# EAGLE board yacc2buss (EAGLE 9.6.2), part 1 of 4
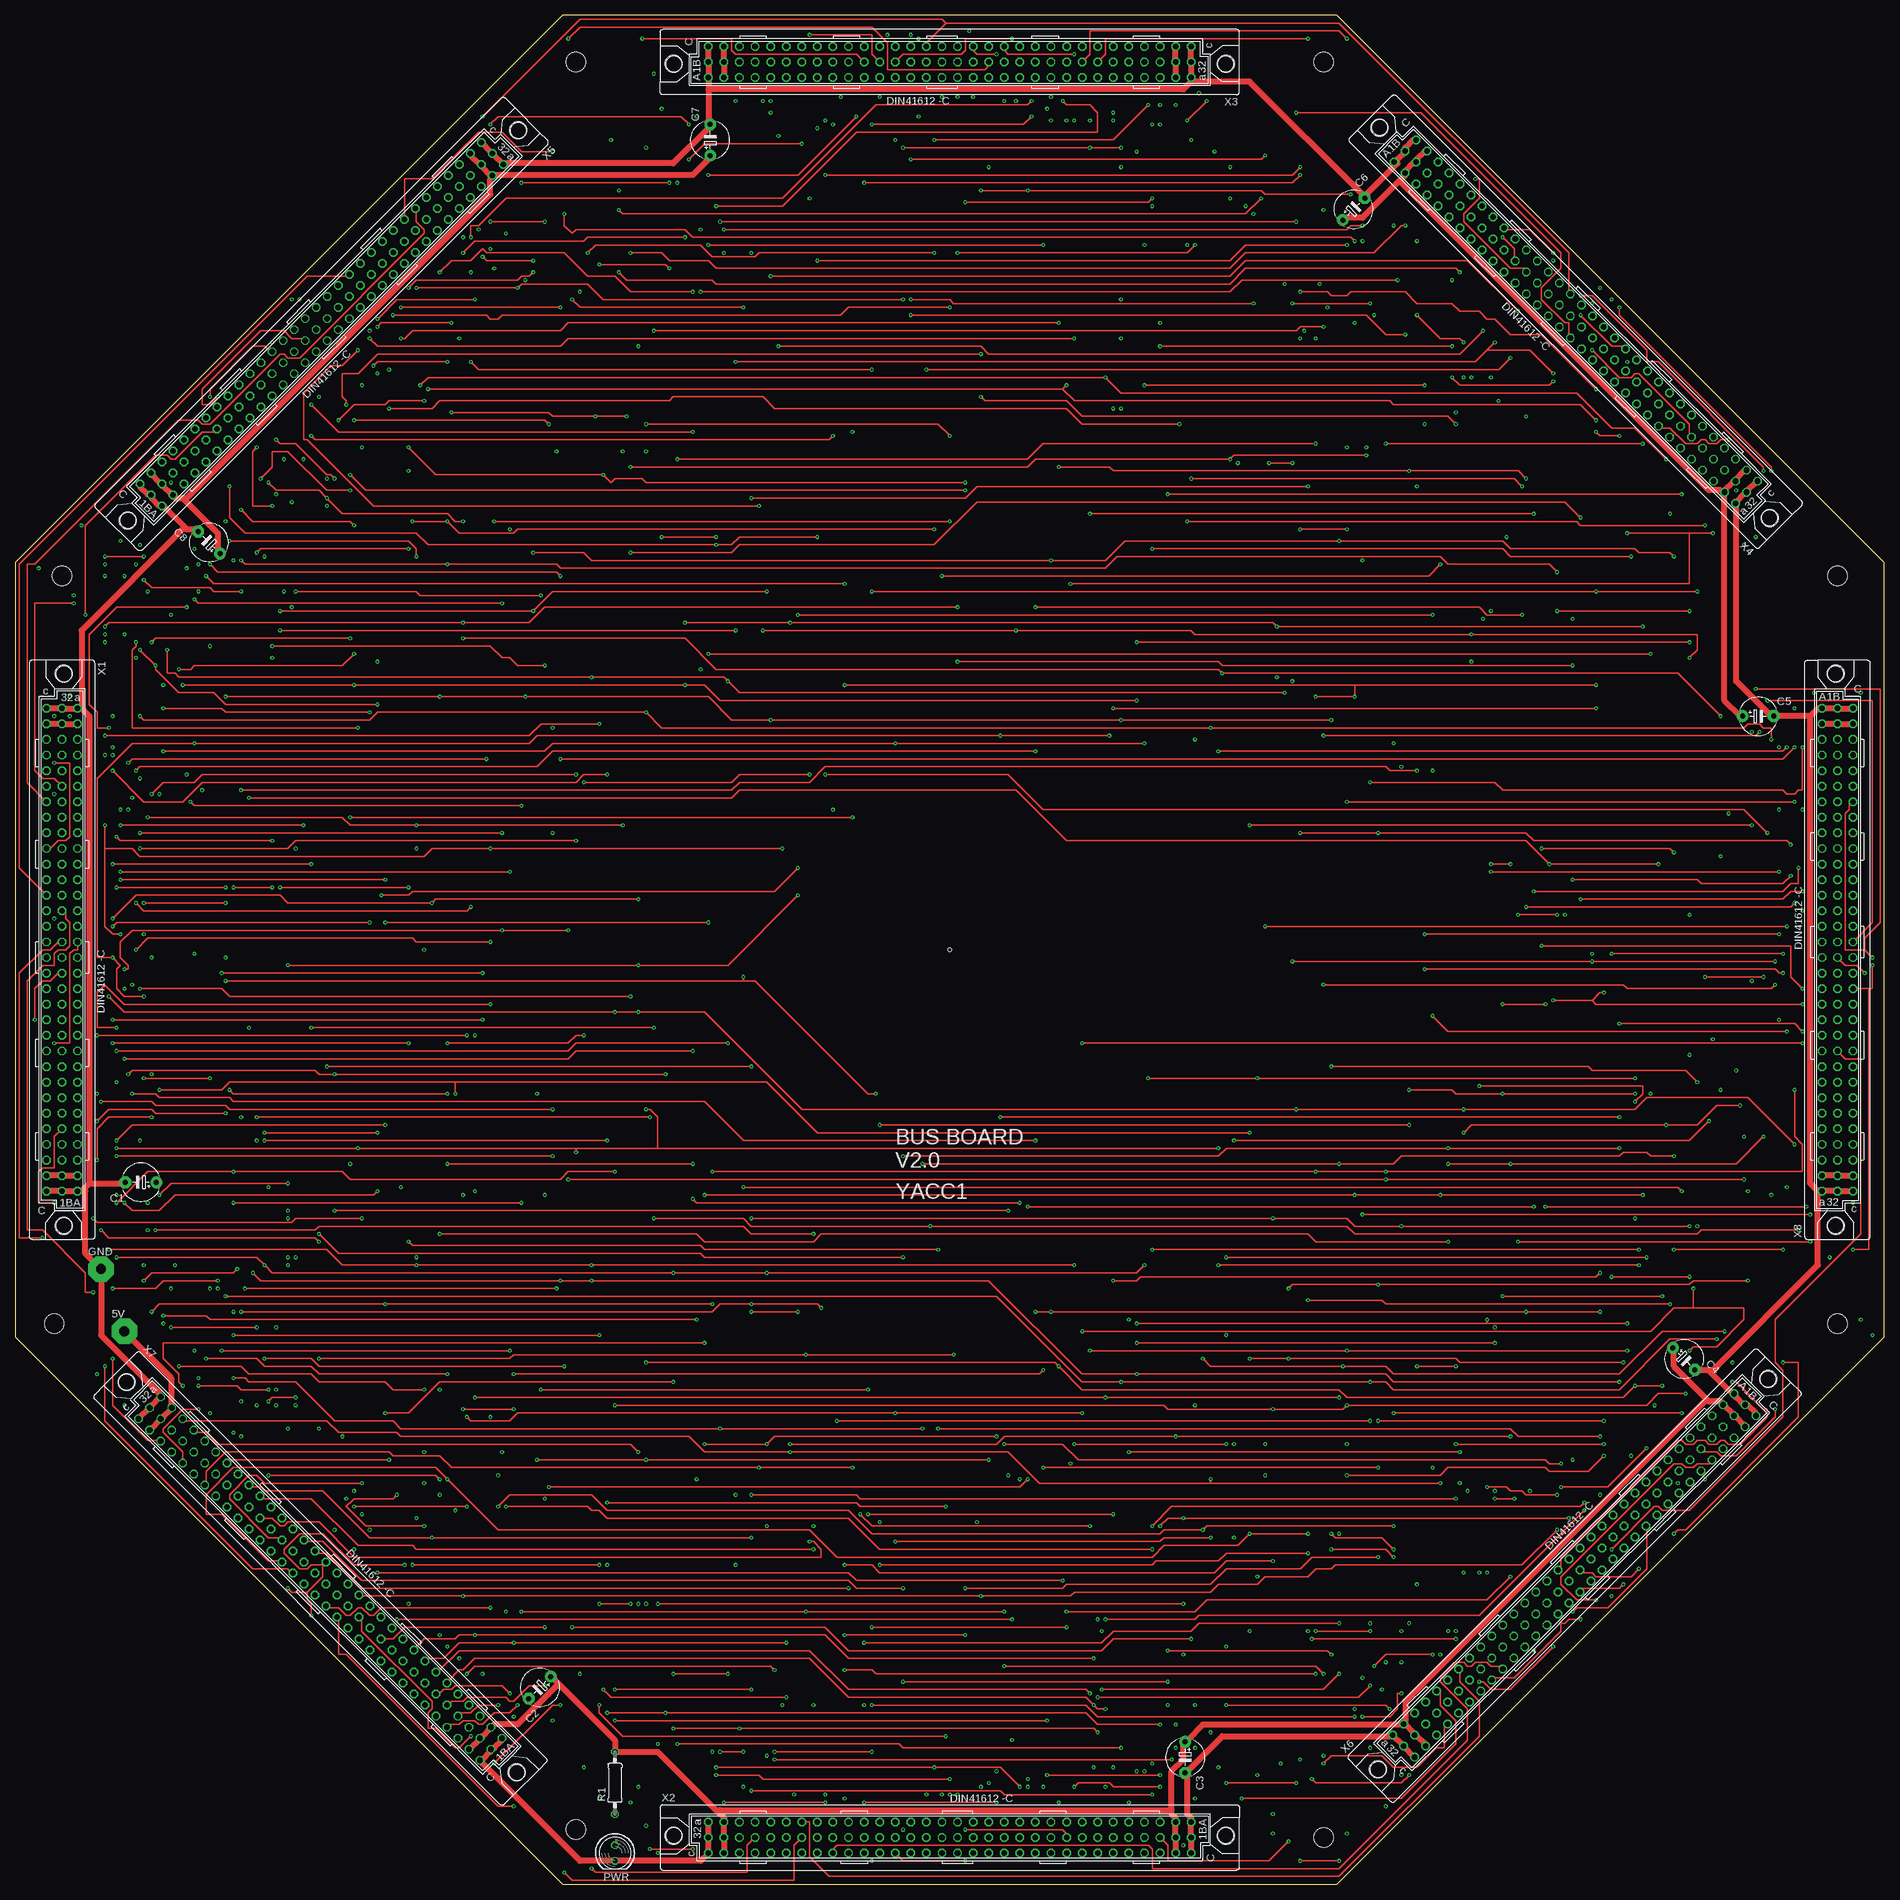
[diagram p0: board, top side]
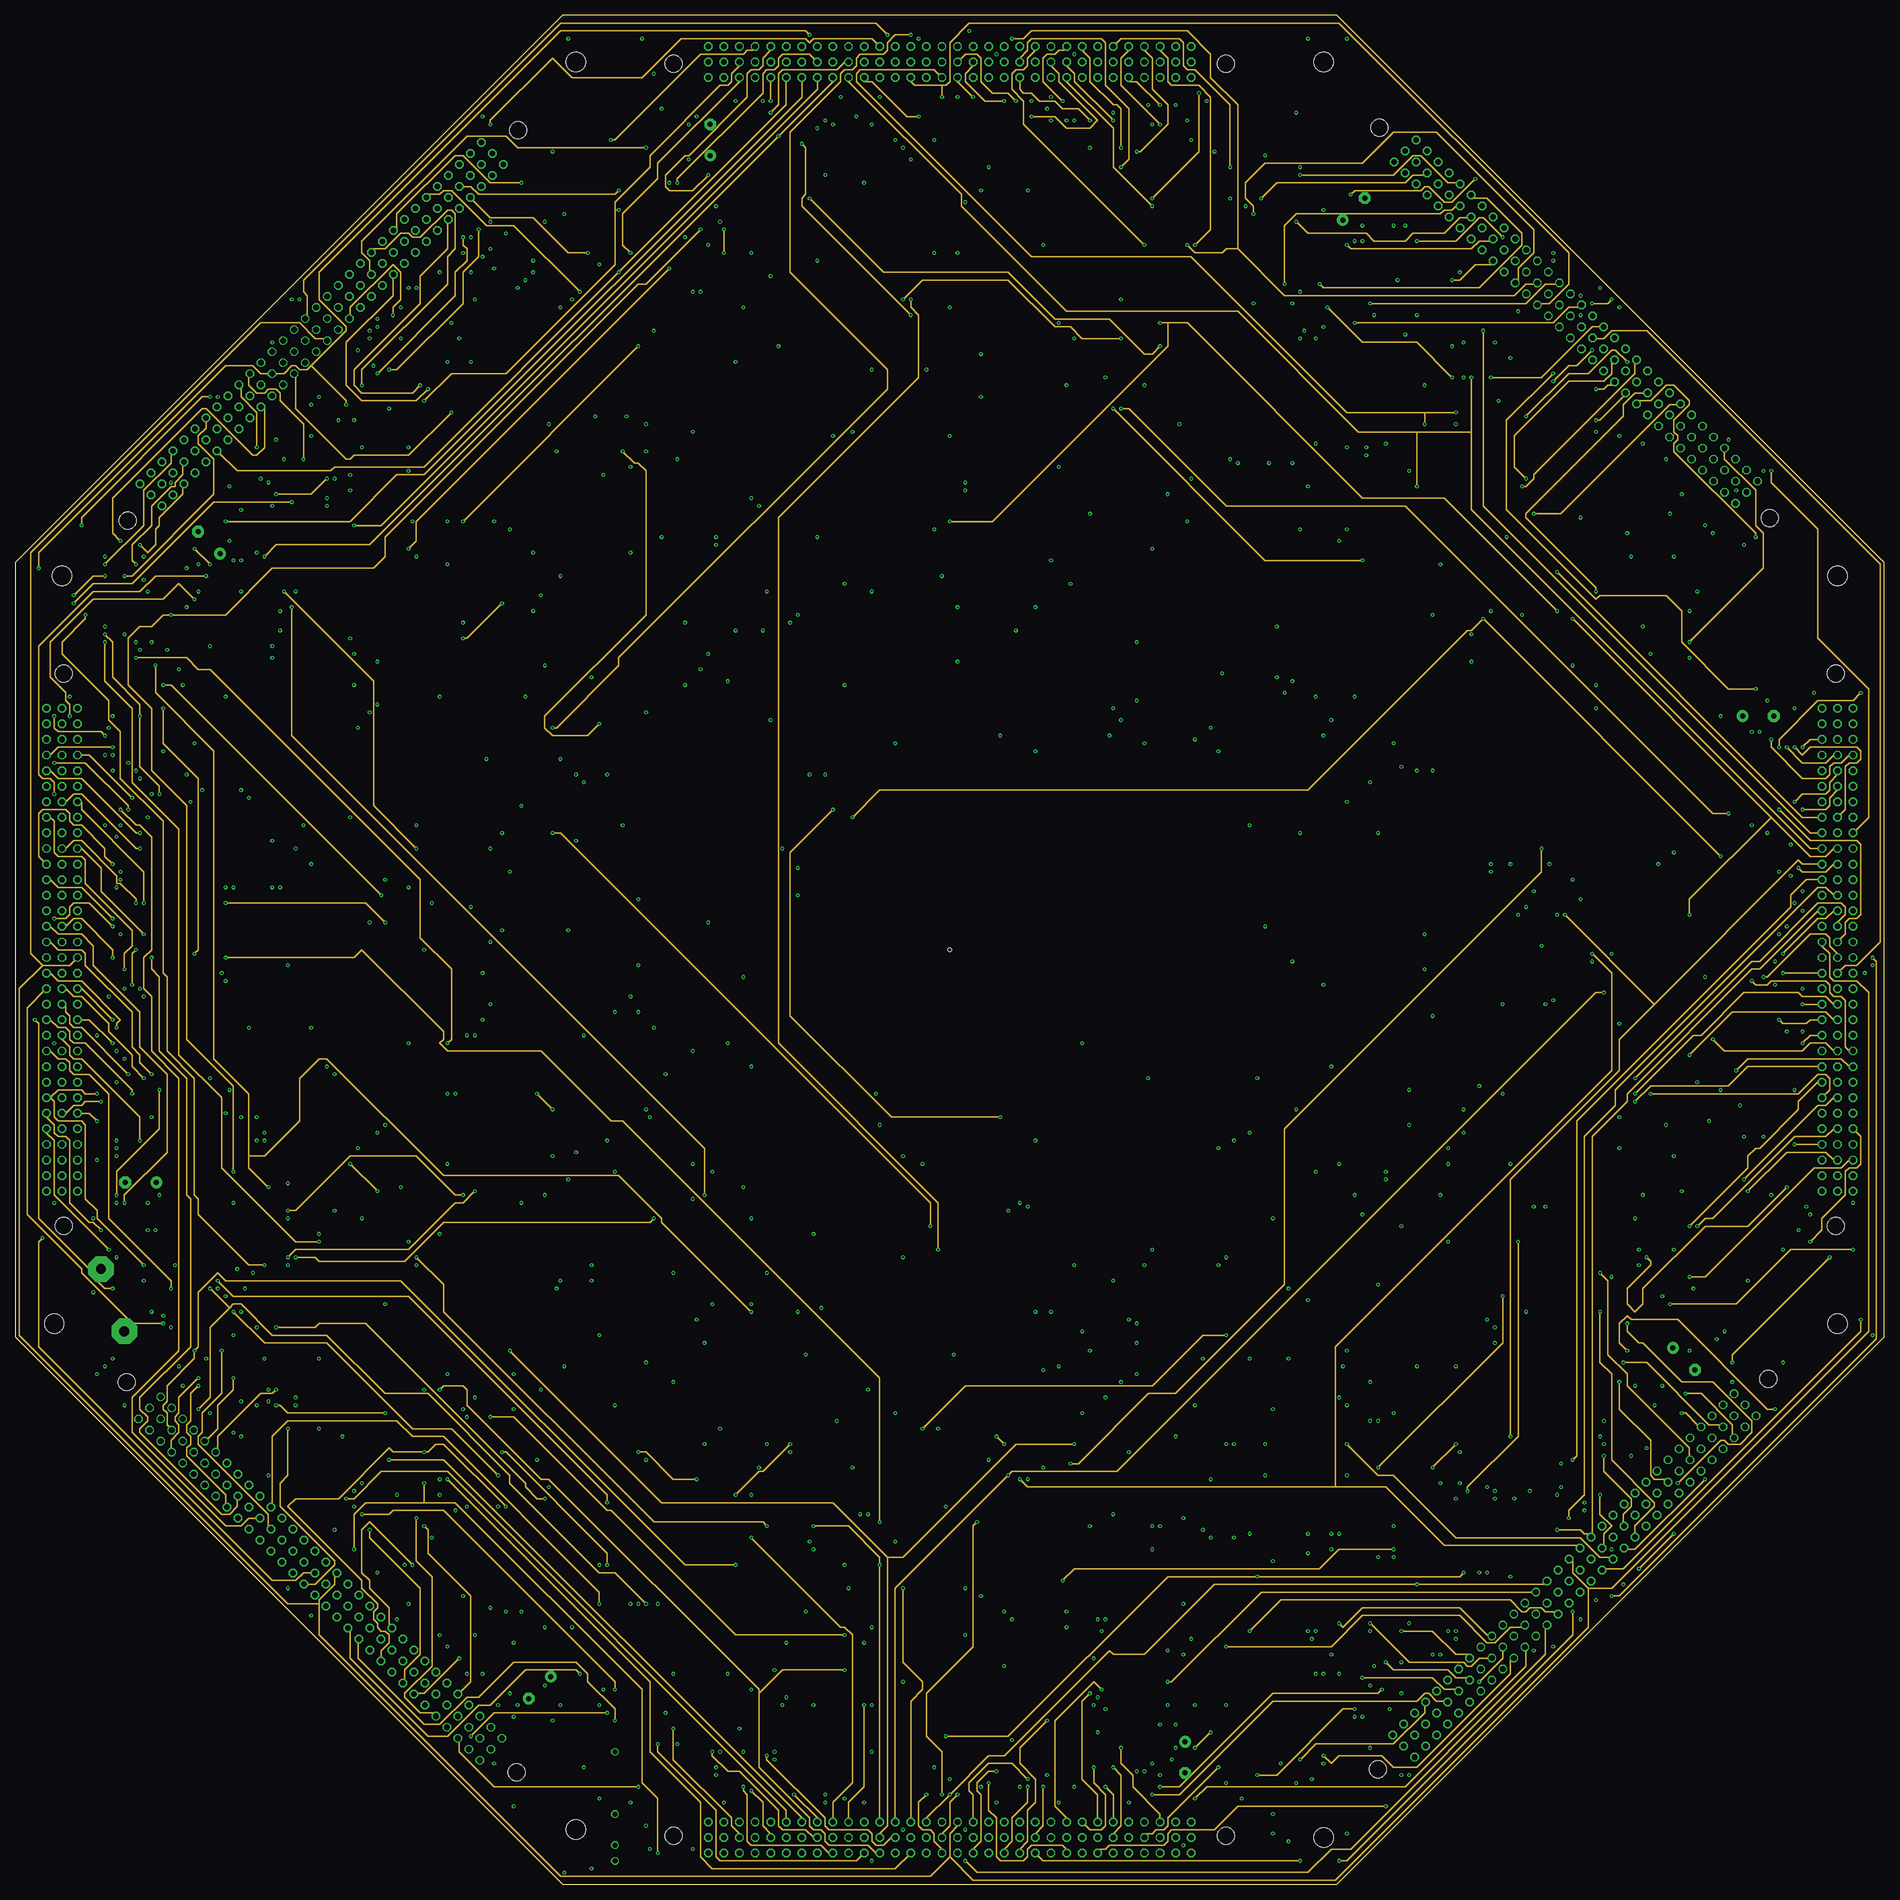
[diagram p1: board, inner layer Route2]
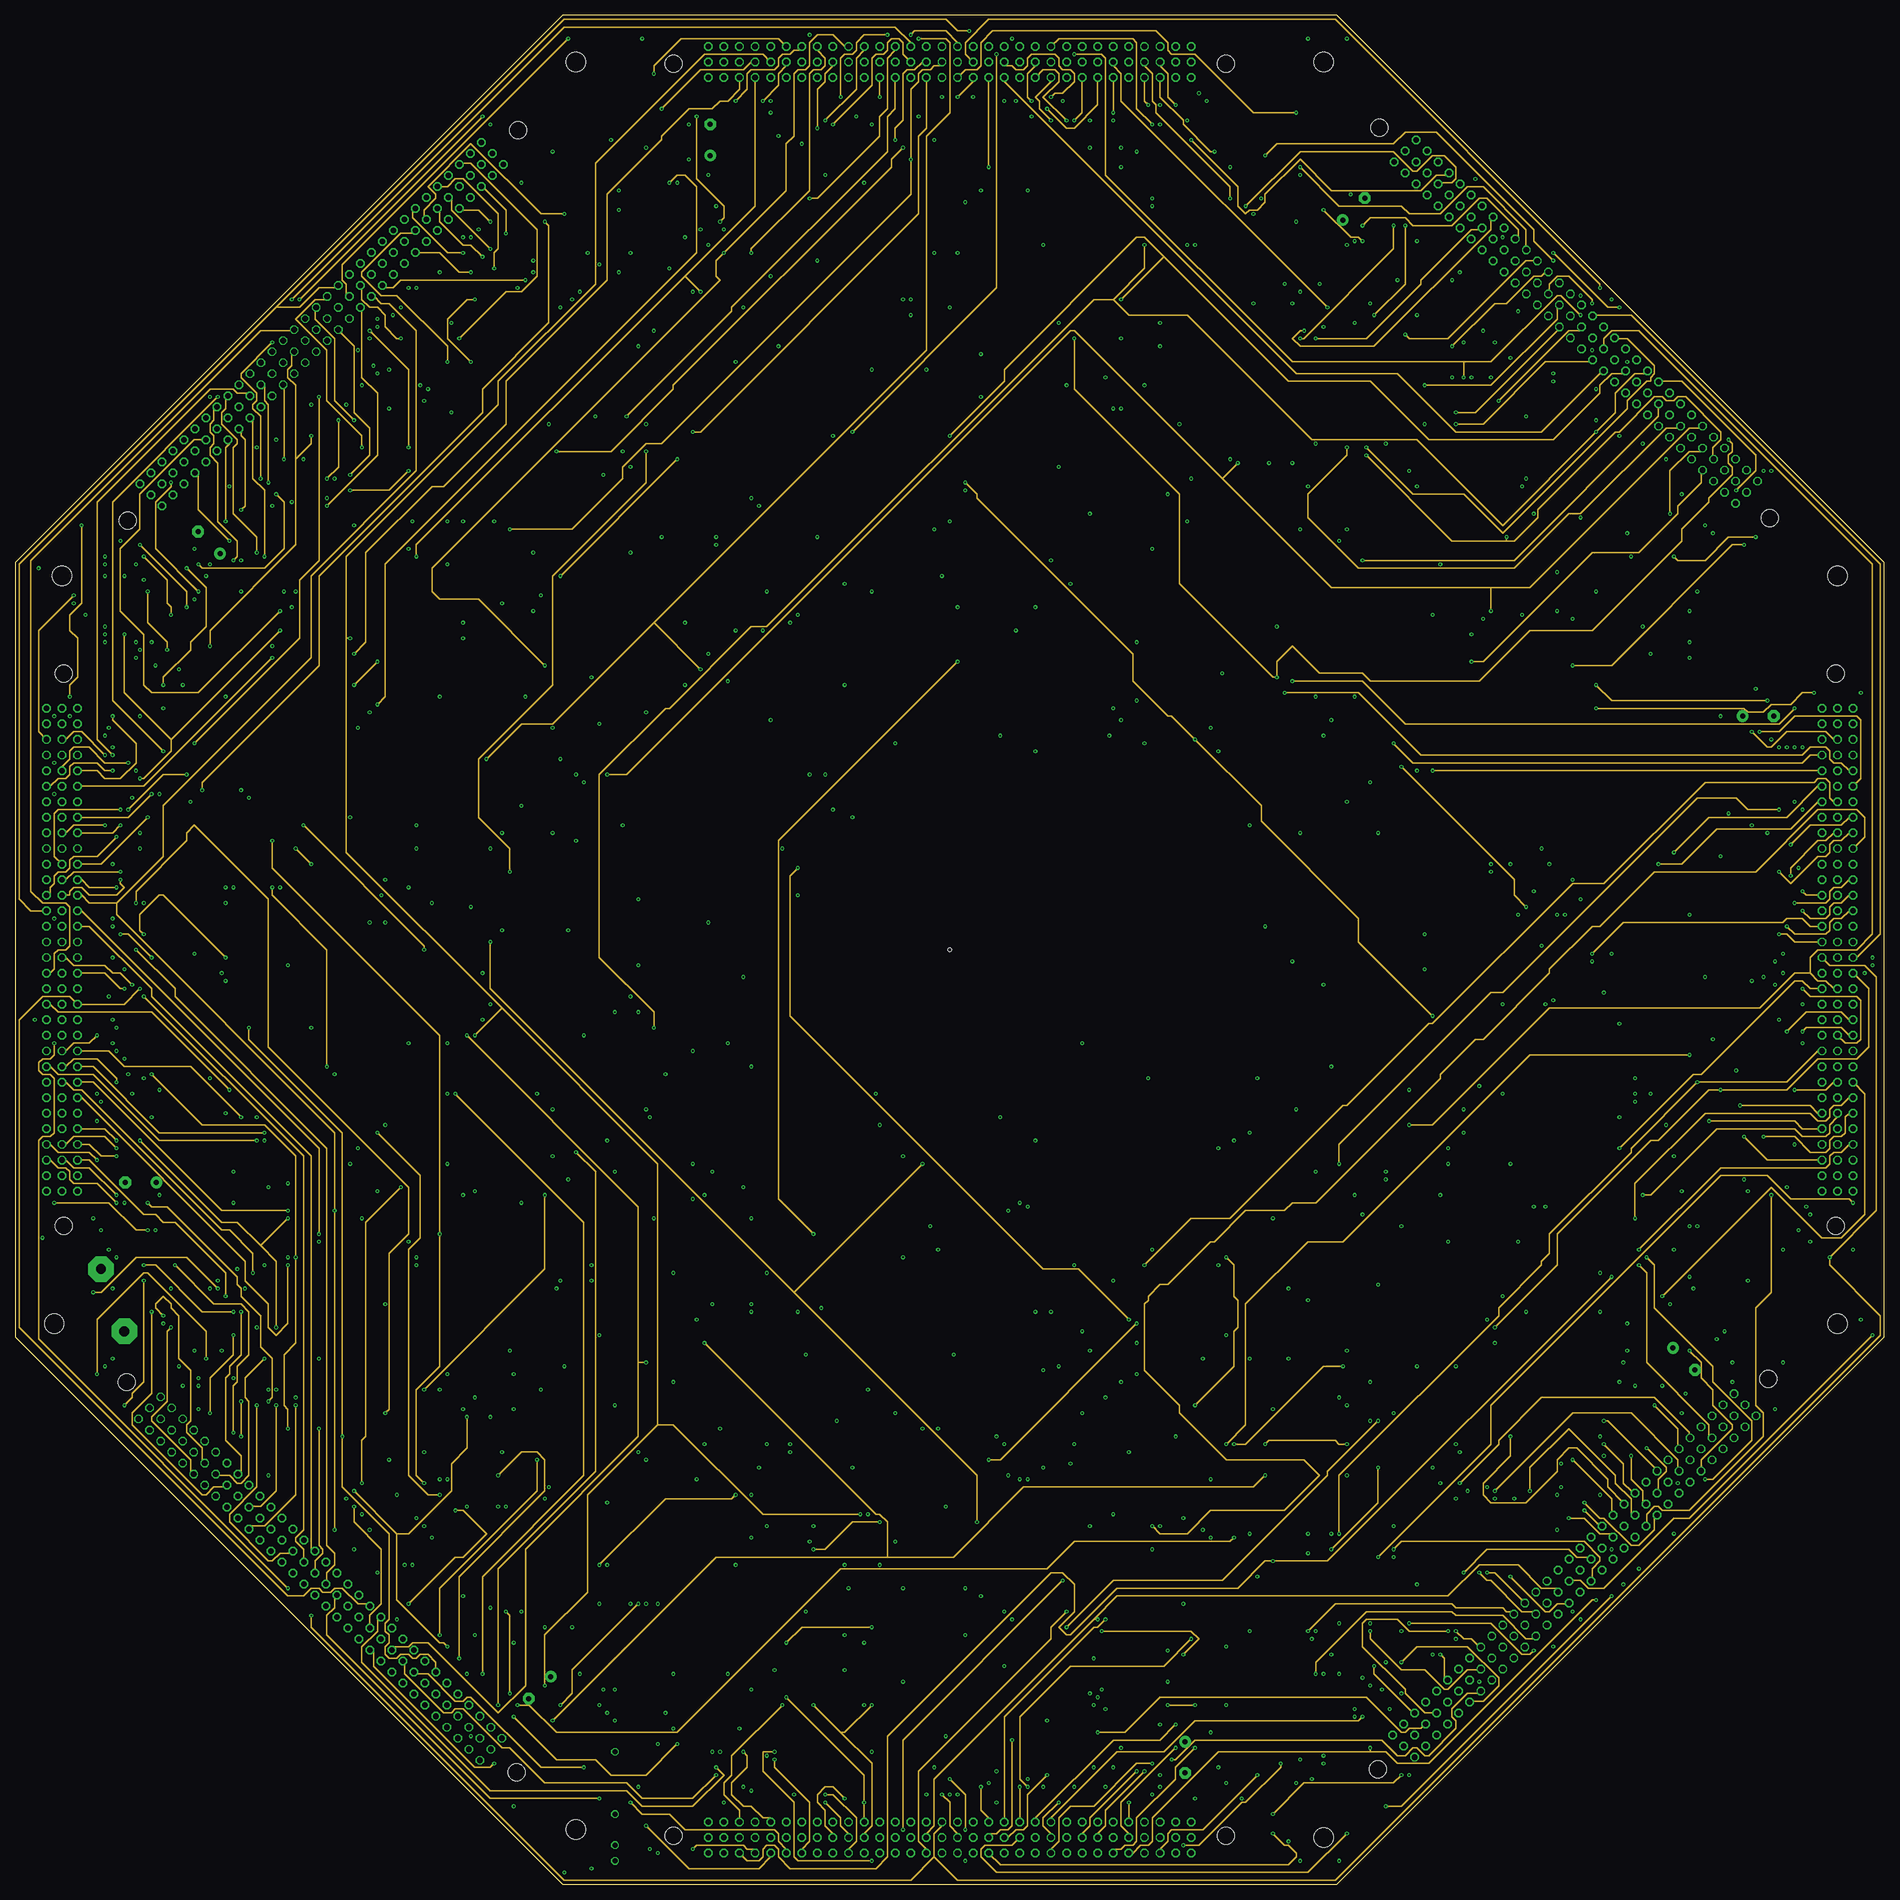
[diagram p2: board, inner layer Route15]
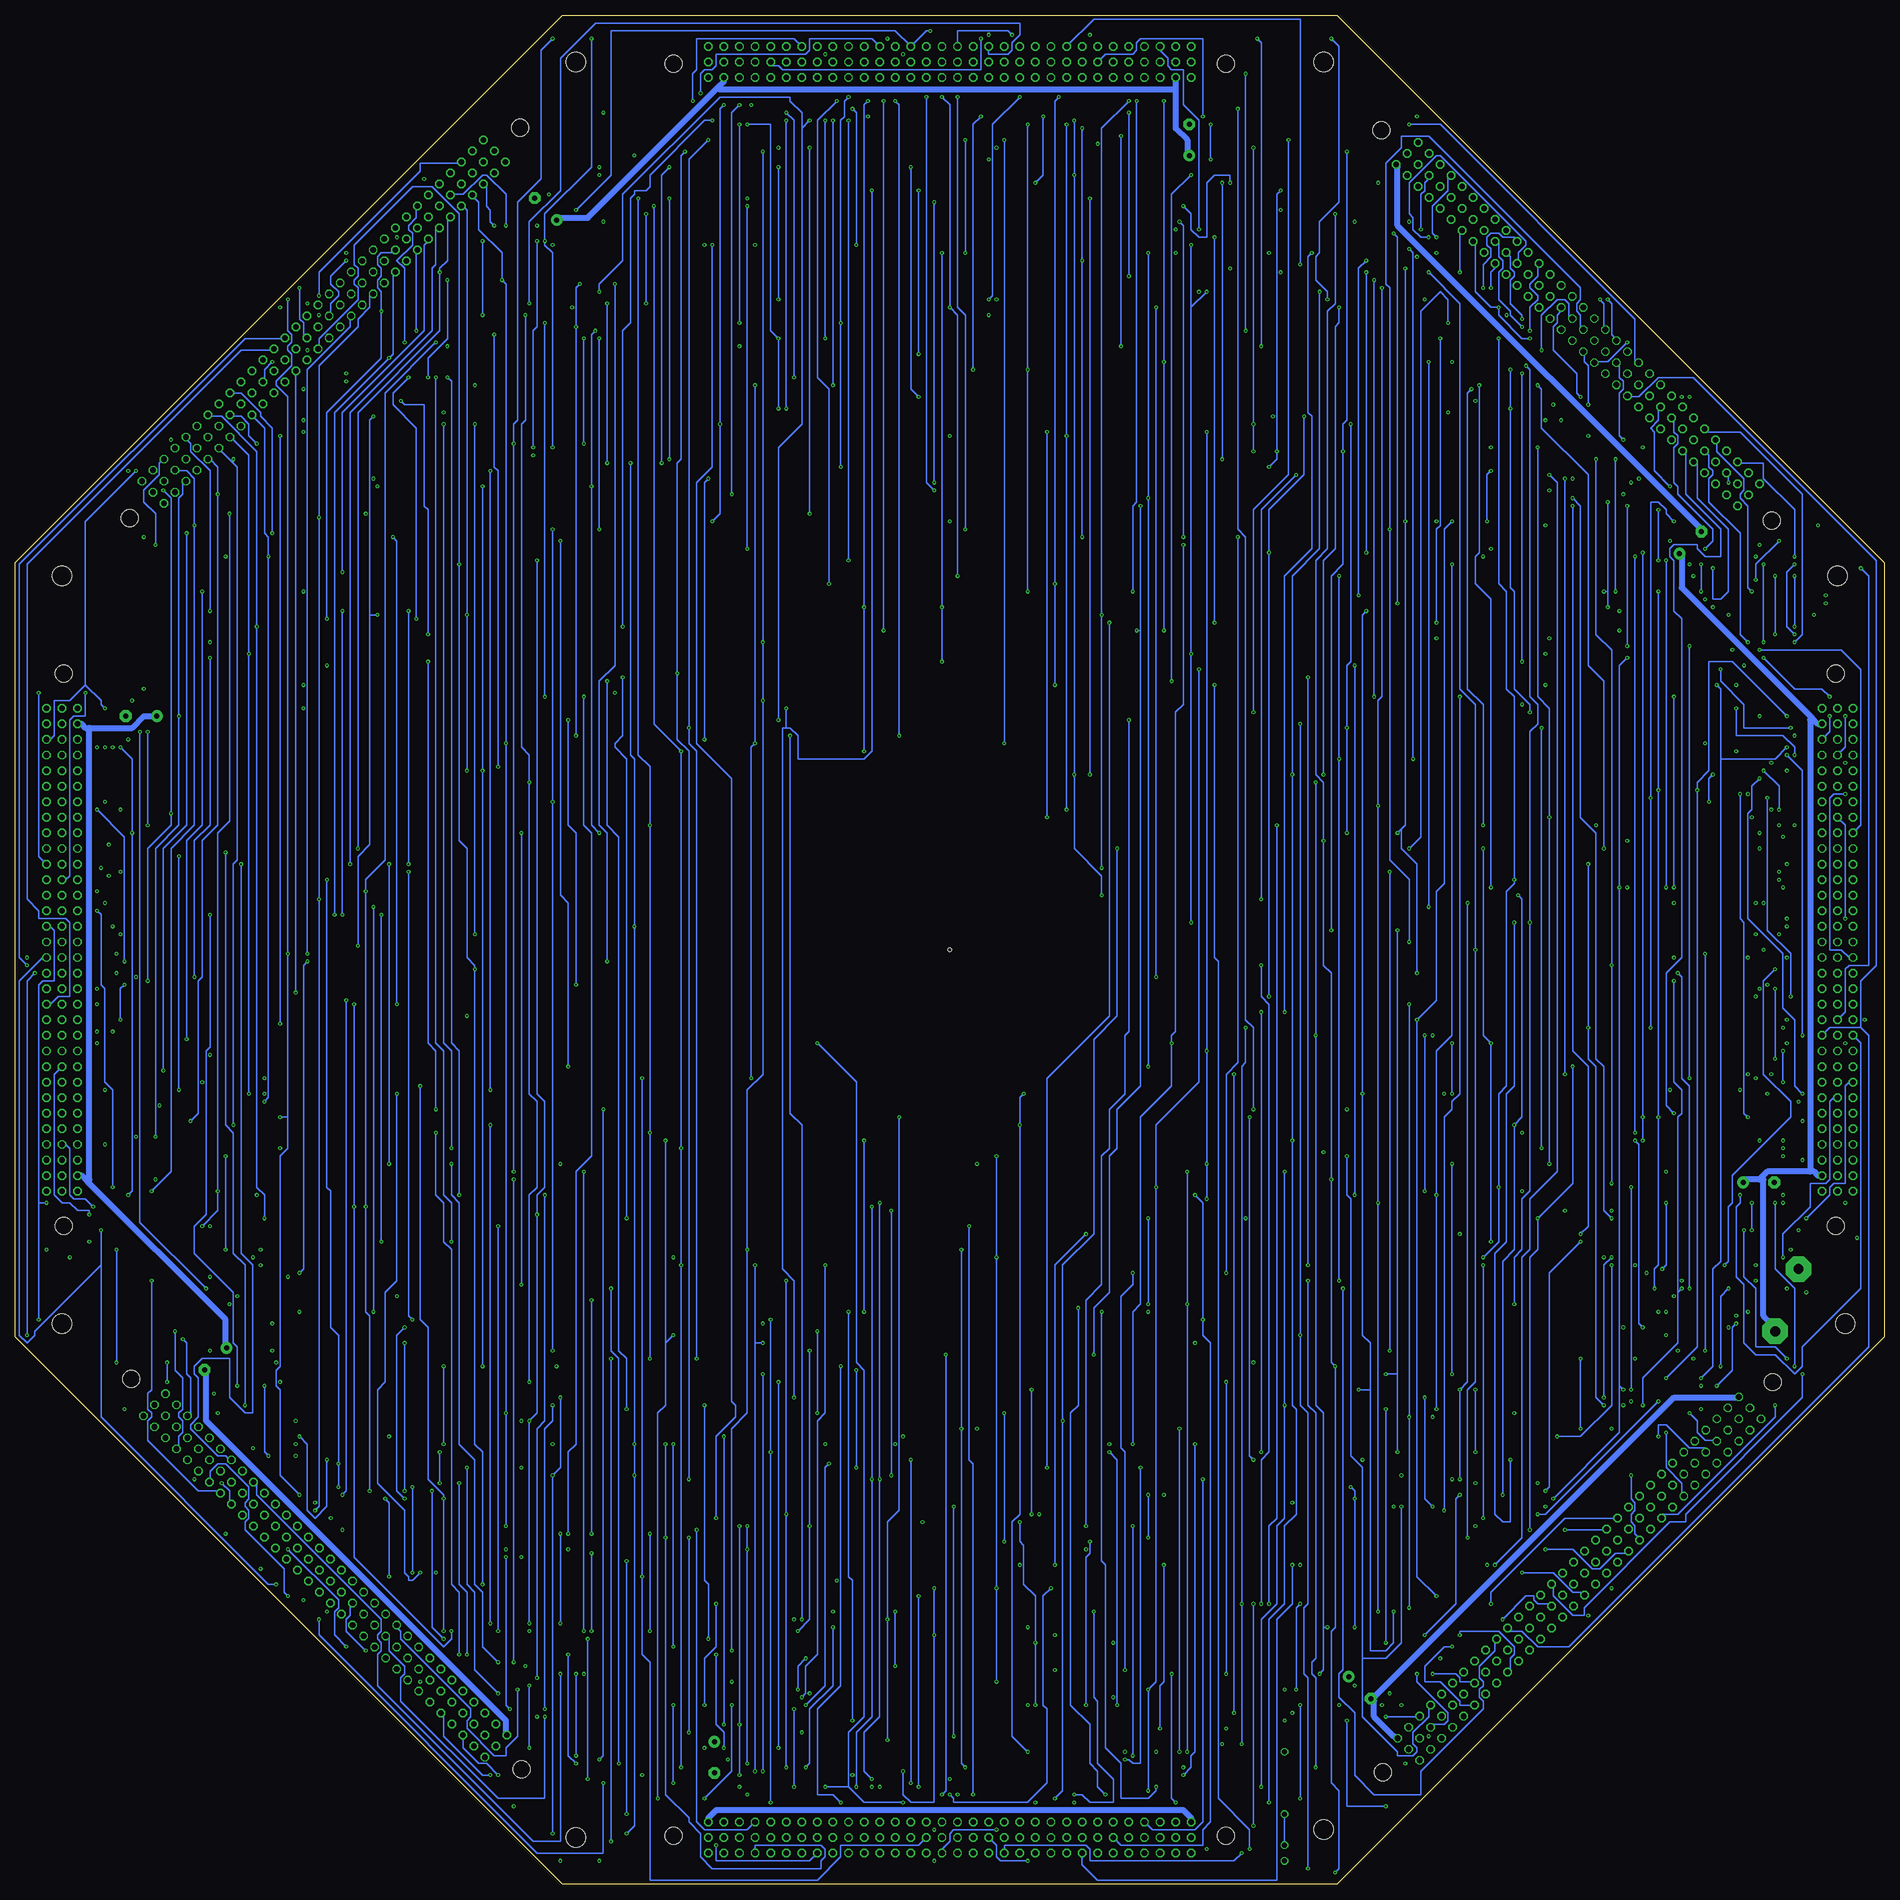
[diagram p3: board, bottom side, seen from below]

Size 304.8 x 304.8 mm. Coordinates in mm from the lower left corner, seen from the top.
Outline: 215.53,0 304.8,89.27 304.8,215.53 215.53,304.8 89.27,304.8 0,215.53 0,89.27 89.27,0 215.53,0
Copper layers (1*2*15*16): Top 0.0356mm / dielectric 1.5011mm / Route2 0.0356mm / dielectric 0.1499mm / Route15 0.0356mm / dielectric 0.2007mm / Bottom 0.0356mm
Design rules "LaenPCBOrder *": minimum track width 10mil, minimum drill 10mil, track to track 25mil, track to pad 8mil, pad to pad 10mil, via to via 10mil, smd to smd 6mil, copper to edge 15mil, drill to drill 6mil, minimum pad ring 7mil, minimum via ring 7mil, stop-mask expansion 3mil, vias tented up to drill 0mil, thermal gap 10mil
Net classes: 1 GND: width 1 mm; 2 5V: width 1 mm; 3 12V: width 1 mm
Holes 0.65 mm at 152.4,152.4
Holes 3.2 mm at 91.44,297.18 213.36,297.18 297.18,213.36 297.18,91.44 7.62,213.36 6.35,91.44 213.36,7.62 91.44,8.89

## Footprints (pad centres in the part's own frame; a part is rotated, then mirrored left to right if it is on the bottom)
4,16O1,6 = drill 1.6 pad 4.166 octagon: 1 0,0
E5-6 = drill 0.813 pad 1.905: + -2.54,0 | drill 0.813 pad 1.905 octagon: - 2.54,0
LED5MM = drill 0.813 octagon: A -1.27,0; K 1.27,0
0207/10 = drill 0.813 octagon: 1 -5.08,0; 2 5.08,0
FABC96S = drill 0.914 octagon: A1 -2.54,39.37; A2 -2.54,36.83; A3 -2.54,34.29; A4 -2.54,31.75; A5 -2.54,29.21; A6 -2.54,26.67; A7 -2.54,24.13; A8 -2.54,21.59; A9 -2.54,19.05; A10 -2.54,16.51; A11 -2.54,13.97; A12 -2.54,11.43; A13 -2.54,8.89; A14 -2.54,6.35; A15 -2.54,3.81; A16 -2.54,1.27; A17 -2.54,-1.27; A18 -2.54,-3.81; A19 -2.54,-6.35; A20 -2.54,-8.89; A21 -2.54,-11.43; A22 -2.54,-13.97; A23 -2.54,-16.51; A24 -2.54,-19.05; A25 -2.54,-21.59; A26 -2.54,-24.13; A27 -2.54,-26.67; A28 -2.54,-29.21; A29 -2.54,-31.75; A30 -2.54,-34.29; A31 -2.54,-36.83; A32 -2.54,-39.37; B1 0,39.37; B2 0,36.83; B3 0,34.29; B4 0,31.75; B5 0,29.21; B6 0,26.67; B7 0,24.13; B8 0,21.59; B9 0,19.05; B10 0,16.51; B11 0,13.97; B12 0,11.43; B13 0,8.89; B14 0,6.35; B15 0,3.81; B16 0,1.27; B17 0,-1.27; B18 0,-3.81; B19 0,-6.35; B20 0,-8.89; B21 0,-11.43; B22 0,-13.97; B23 0,-16.51; B24 0,-19.05; B25 0,-21.59; B26 0,-24.13; B27 0,-26.67; B28 0,-29.21; B29 0,-31.75; B30 0,-34.29; B31 0,-36.83; B32 0,-39.37; C1 2.54,39.37; C2 2.54,36.83; C3 2.54,34.29; C4 2.54,31.75; C5 2.54,29.21; C6 2.54,26.67; C7 2.54,24.13; C8 2.54,21.59; C9 2.54,19.05; C10 2.54,16.51; C11 2.54,13.97; C12 2.54,11.43; C13 2.54,8.89; C14 2.54,6.35; C15 2.54,3.81; C16 2.54,1.27; C17 2.54,-1.27; C18 2.54,-3.81; C19 2.54,-6.35; C20 2.54,-8.89; C21 2.54,-11.43; C22 2.54,-13.97; C23 2.54,-16.51; C24 2.54,-19.05; C25 2.54,-21.59; C26 2.54,-24.13; C27 2.54,-26.67; C28 2.54,-29.21; C29 2.54,-31.75; C30 2.54,-34.29; C31 2.54,-36.83; C32 2.54,-39.37 | hole 2.794: -0.305,45.009; -0.305,-45.009

## Placement (x,y rotation side)
5V  WIREPAD4,16O1,6  [4,16O1,6]  17.78,90.17 0 top
C1  [E5-6]  20.47,114.45 180 top
C2  [E5-6]  85.53,32.06 225 top
C3  [E5-6]  190.78,20.69 270 top
C4  [E5-6]  272.15,85.68 315 top
C5  [E5-6]  284.26,190.5 0 top
C6  [E5-6]  218.29,273.2 45 top
C7  [E5-6]  113.34,284.48 90 top
C8  [E5-6]  31.6,218.81 135 top
GND  WIREPAD4,16O1,6  [4,16O1,6]  13.97,100.33 0 top
PWR  [LED5MM]  97.79,5.08 270 top
R1  330  [0207/10]  97.79,16.51 90 top
X1  FABC96S  [FABC96S]  7.62,152.4 180 top
X2  FABC96S  [FABC96S]  152.4,7.62 270 top
X3  FABC96S  [FABC96S]  152.4,297.18 90 top
X4  FABC96S  [FABC96S]  254.52,254.87 45 top
X5  FABC96S  [FABC96S]  49.97,254.44 135 top
X6  FABC96S  [FABC96S]  254.28,50.34 315 top
X7  FABC96S  [FABC96S]  49.75,49.84 225 top
X8  FABC96S  [FABC96S]  297.18,152.4 0 top

## Library data of the parts
5V GND = wirepad
C1-C8 = rcl
PWR = led
R1 = eagle-ltspice; SPICEMODEL: NONE; SPICEPREFIX: R
X1-X8 = con-vg

## Nets
5V [5V]: 5V.1 C1.+ C2.+ C3.+ C4.+ C5.+ C6.+ C7.+ C8.+ R1.2 X1.A2 X1.A31 X1.B2 X1.B31 X1.C2 X1.C31 X2.A2 X2.A31 X2.B2 X2.B31 X2.C2 X2.C31 X3.A2 X3.A31 X3.B2 X3.B31 X3.C2 X3.C31 X4.A2 X4.A31 X4.B2 X4.B31 X4.C2 X4.C31 X5.A2 X5.A31 X5.B2 X5.B31 X5.C2 X5.C31 X6.A2 X6.A31 X6.B2 X6.B31 X6.C2 X6.C31 X7.A2 X7.A31 X7.B2 X7.B31 X7.C2 X7.C31 X8.A2 X8.A31 X8.B2 X8.B31 X8.C2 X8.C31
GND [GND]: C1.- C2.- C3.- C4.- C5.- C6.- C7.- C8.- GND.1 PWR.K X1.A1 X1.A32 X1.B1 X1.B32 X1.C1 X1.C32 X2.A1 X2.A32 X2.B1 X2.B32 X2.C1 X2.C32 X3.A1 X3.A32 X3.B1 X3.B32 X3.C1 X3.C32 X4.A1 X4.A32 X4.B1 X4.B32 X4.C1 X4.C32 X5.A1 X5.A32 X5.B1 X5.B32 X5.C1 X5.C32 X6.A1 X6.A32 X6.B1 X6.B32 X6.C1 X6.C32 X7.A1 X7.A32 X7.B1 X7.B32 X7.C1 X7.C32 X8.A1 X8.A32 X8.B1 X8.B32 X8.C1 X8.C32
N$2: PWR.A R1.1
SIG0: X1.A4 X2.A4 X3.A4 X4.A4 X5.A4 X6.A4 X7.A4 X8.A4
SIG1: X1.B4 X2.B4 X3.B4 X4.B4 X5.B4 X6.B4 X7.B4 X8.B4
SIG2: X1.C4 X2.C4 X3.C4 X4.C4 X5.C4 X6.C4 X7.C4 X8.C4
SIG3: X1.A5 X2.A5 X3.A5 X4.A5 X5.A5 X6.A5 X7.A5 X8.A5
SIG4: X1.B5 X2.B5 X3.B5 X4.B5 X5.B5 X6.B5 X7.B5 X8.B5
SIG5: X1.C5 X2.C5 X3.C5 X4.C5 X5.C5 X6.C5 X7.C5 X8.C5
SIG6: X1.A6 X2.A6 X3.A6 X4.A6 X5.A6 X6.A6 X7.A6 X8.A6
SIG7: X1.B6 X2.B6 X3.B6 X4.B6 X5.B6 X6.B6 X7.B6 X8.B6
SIG8: X1.C6 X2.C6 X3.C6 X4.C6 X5.C6 X6.C6 X7.C6 X8.C6
SIG9: X1.A7 X2.A7 X3.A7 X4.A7 X5.A7 X6.A7 X7.A7 X8.A7
SIG10: X1.B7 X2.B7 X3.B7 X4.B7 X5.B7 X6.B7 X7.B7 X8.B7
SIG11: X1.C7 X2.C7 X3.C7 X4.C7 X5.C7 X6.C7 X7.C7 X8.C7
SIG12: X1.A8 X2.A8 X3.A8 X4.A8 X5.A8 X6.A8 X7.A8 X8.A8
SIG13: X1.B8 X2.B8 X3.B8 X4.B8 X5.B8 X6.B8 X7.B8 X8.B8
SIG14: X1.C8 X2.C8 X3.C8 X4.C8 X5.C8 X6.C8 X7.C8 X8.C8
SIG15: X1.A9 X2.A9 X3.A9 X4.A9 X5.A9 X6.A9 X7.A9 X8.A9
SIG16: X1.B9 X2.B9 X3.B9 X4.B9 X5.B9 X6.B9 X7.B9 X8.B9
SIG17: X1.C9 X2.C9 X3.C9 X4.C9 X5.C9 X6.C9 X7.C9 X8.C9
SIG18: X1.A10 X2.A10 X3.A10 X4.A10 X5.A10 X6.A10 X7.A10 X8.A10
SIG19: X1.B10 X2.B10 X3.B10 X4.B10 X5.B10 X6.B10 X7.B10 X8.B10
SIG20: X1.C10 X2.C10 X3.C10 X4.C10 X5.C10 X6.C10 X7.C10 X8.C10
SIG21: X1.A11 X2.A11 X3.A11 X4.A11 X5.A11 X6.A11 X7.A11 X8.A11
SIG22: X1.B11 X2.B11 X3.B11 X4.B11 X5.B11 X6.B11 X7.B11 X8.B11
SIG23: X1.C11 X2.C11 X3.C11 X4.C11 X5.C11 X6.C11 X7.C11 X8.C11
SIG24: X1.A12 X2.A12 X3.A12 X4.A12 X5.A12 X6.A12 X7.A12 X8.A12
SIG25: X1.B12 X2.B12 X3.B12 X4.B12 X5.B12 X6.B12 X7.B12 X8.B12
SIG26: X1.C12 X2.C12 X3.C12 X4.C12 X5.C12 X6.C12 X7.C12 X8.C12
SIG27: X1.A13 X2.A13 X3.A13 X4.A13 X5.A13 X6.A13 X7.A13 X8.A13
SIG28: X1.B13 X2.B13 X3.B13 X4.B13 X5.B13 X6.B13 X7.B13 X8.B13
SIG29: X1.C13 X2.C13 X3.C13 X4.C13 X5.C13 X6.C13 X7.C13 X8.C13
SIG30: X1.A14 X2.A14 X3.A14 X4.A14 X5.A14 X6.A14 X7.A14 X8.A14
SIG31: X1.B14 X2.B14 X3.B14 X4.B14 X5.B14 X6.B14 X7.B14 X8.B14
SIG32: X1.C14 X2.C14 X3.C14 X4.C14 X5.C14 X6.C14 X7.C14 X8.C14
SIG33: X1.A15 X2.A15 X3.A15 X4.A15 X5.A15 X6.A15 X7.A15 X8.A15
SIG34: X1.B15 X2.B15 X3.B15 X4.B15 X5.B15 X6.B15 X7.B15 X8.B15
SIG35: X1.C15 X2.C15 X3.C15 X4.C15 X5.C15 X6.C15 X7.C15 X8.C15
SIG36: X1.A16 X2.A16 X3.A16 X4.A16 X5.A16 X6.A16 X7.A16 X8.A16
SIG37: X1.B16 X2.B16 X3.B16 X4.B16 X5.B16 X6.B16 X7.B16 X8.B16
SIG38: X1.C16 X2.C16 X3.C16 X4.C16 X5.C16 X6.C16 X7.C16 X8.C16
SIG39: X1.A17 X2.A17 X3.A17 X4.A17 X5.A17 X6.A17 X7.A17 X8.A17
SIG40: X1.B17 X2.B17 X3.B17 X4.B17 X5.B17 X6.B17 X7.B17 X8.B17
SIG41: X1.C17 X2.C17 X3.C17 X4.C17 X5.C17 X6.C17 X7.C17 X8.C17
SIG42: X1.A18 X2.A18 X3.A18 X4.A18 X5.A18 X6.A18 X7.A18 X8.A18
SIG43: X1.B18 X2.B18 X3.B18 X4.B18 X5.B18 X6.B18 X7.B18 X8.B18
SIG44: X1.C18 X2.C18 X3.C18 X4.C18 X5.C18 X6.C18 X7.C18 X8.C18
SIG45: X1.A19 X2.A19 X3.A19 X4.A19 X5.A19 X6.A19 X7.A19 X8.A19
SIG46: X1.B19 X2.B19 X3.B19 X4.B19 X5.B19 X6.B19 X7.B19 X8.B19
SIG47: X1.C19 X2.C19 X3.C19 X4.C19 X5.C19 X6.C19 X7.C19 X8.C19
SIG48: X1.A20 X2.A20 X3.A20 X4.A20 X5.A20 X6.A20 X7.A20 X8.A20
SIG49: X1.B20 X2.B20 X3.B20 X4.B20 X5.B20 X6.B20 X7.B20 X8.B20
SIG50: X1.C20 X2.C20 X3.C20 X4.C20 X5.C20 X6.C20 X7.C20 X8.C20
SIG51: X1.A21 X2.A21 X3.A21 X4.A21 X5.A21 X6.A21 X7.A21 X8.A21
SIG52: X1.B21 X2.B21 X3.B21 X4.B21 X5.B21 X6.B21 X7.B21 X8.B21
SIG53: X1.C21 X2.C21 X3.C21 X4.C21 X5.C21 X6.C21 X7.C21 X8.C21
SIG54: X1.A22 X2.A22 X3.A22 X4.A22 X5.A22 X6.A22 X7.A22 X8.A22
SIG55: X1.B22 X2.B22 X3.B22 X4.B22 X5.B22 X6.B22 X7.B22 X8.B22
SIG56: X1.C22 X2.C22 X3.C22 X4.C22 X5.C22 X6.C22 X7.C22 X8.C22
SIG57: X1.A23 X2.A23 X3.A23 X4.A23 X5.A23 X6.A23 X7.A23 X8.A23
SIG58: X1.B23 X2.B23 X3.B23 X4.B23 X5.B23 X6.B23 X7.B23 X8.B23
SIG59: X1.C23 X2.C23 X3.C23 X4.C23 X5.C23 X6.C23 X7.C23 X8.C23
SIG60: X1.A24 X2.A24 X3.A24 X4.A24 X5.A24 X6.A24 X7.A24 X8.A24
SIG61: X1.B24 X2.B24 X3.B24 X4.B24 X5.B24 X6.B24 X7.B24 X8.B24
SIG62: X1.C24 X2.C24 X3.C24 X4.C24 X5.C24 X6.C24 X7.C24 X8.C24
SIG63: X1.A25 X2.A25 X3.A25 X4.A25 X5.A25 X6.A25 X7.A25 X8.A25
SIG64: X1.B25 X2.B25 X3.B25 X4.B25 X5.B25 X6.B25 X7.B25 X8.B25
SIG65: X1.C25 X2.C25 X3.C25 X4.C25 X5.C25 X6.C25 X7.C25 X8.C25
SIG66: X1.A26 X2.A26 X3.A26 X4.A26 X5.A26 X6.A26 X7.A26 X8.A26
SIG67: X1.B26 X2.B26 X3.B26 X4.B26 X5.B26 X6.B26 X7.B26 X8.B26
SIG68: X1.C26 X2.C26 X3.C26 X4.C26 X5.C26 X6.C26 X7.C26 X8.C26
SIG69: X1.A27 X2.A27 X3.A27 X4.A27 X5.A27 X6.A27 X7.A27 X8.A27
SIG70: X1.B27 X2.B27 X3.B27 X4.B27 X5.B27 X6.B27 X7.B27 X8.B27
SIG71: X1.C27 X2.C27 X3.C27 X4.C27 X5.C27 X6.C27 X7.C27 X8.C27
SIG72: X1.A28 X2.A28 X3.A28 X4.A28 X5.A28 X6.A28 X7.A28 X8.A28
SIG73: X1.B28 X2.B28 X3.B28 X4.B28 X5.B28 X6.B28 X7.B28 X8.B28
SIG74: X1.C28 X2.C28 X3.C28 X4.C28 X5.C28 X6.C28 X7.C28 X8.C28
SIG75: X1.A29 X2.A29 X3.A29 X4.A29 X5.A29 X6.A29 X7.A29 X8.A29
SIG76: X1.B29 X2.B29 X3.B29 X4.B29 X5.B29 X6.B29 X7.B29 X8.B29
SIG77: X1.C29 X2.C29 X3.C29 X4.C29 X5.C29 X6.C29 X7.C29 X8.C29
SIG78: X1.A30 X2.A30 X3.A30 X4.A30 X5.A30 X6.A30 X7.A30 X8.A30
SIG79: X1.B30 X2.B30 X3.B30 X4.B30 X5.B30 X6.B30 X7.B30 X8.B30
SIG80: X1.C30 X2.C30 X3.C30 X4.C30 X5.C30 X6.C30 X7.C30 X8.C30
SIG81: X1.A3 X2.A3 X3.A3 X4.A3 X5.A3 X6.A3 X7.A3 X8.A3
SIG82: X1.B3 X2.B3 X3.B3 X4.B3 X5.B3 X6.B3 X7.B3 X8.B3
SIG83: X1.C3 X2.C3 X3.C3 X4.C3 X5.C3 X6.C3 X7.C3 X8.C3

## Tracks (layer width: path | path; a pad name or v marks a point on that pad's centre or on a via)
5V
  Top 1: X5.A31 77.47,278.76 76.2,280.03 X5.B31 75.56,280.67 74.29,281.94 X5.C31 | X3.A2 X3.B2 X3.C2 | X5.A31 78.1,278.76 110.49,278.76 113.03,281.3 C7.+ | X3.A31 X3.B31 X3.C31 | X4.C2 229.87,282.57 228.6,281.3 X4.B2 227.96,280.67 226.69,279.4 X4.A2 226.69,278.76 225.74,277.81 | 225.74,277.81 219.71,271.78 216.53,271.78 C6.+ | X1.C2 X1.B2 X1.A2 | X7.C31 22.22,74.29 23.49,75.56 X7.B31 24.13,76.2 25.4,77.47 X7.A31 25.4,78.1 25.4,82.55 5V.1 | 5V.1 | X1.C31 X1.B31 X1.A31 | X5.C2 22.22,229.87 23.49,228.6 X5.B2 24.13,227.96 25.4,226.69 X5.A2 26.03,226.06 27.3,226.06 27.62,225.74 | 27.62,225.74 33.02,220.34 33.02,217.17 C8.+ | 27.62,225.74 77.47,275.59 77.47,278.13 X5.A31 | X6.A31 226.69,26.03 227.96,24.76 X6.B31 228.6,24.13 229.87,22.86 X6.C31 | X2.C2 X2.B2 X2.A2 189.23,10.79 188.59,11.43 188.59,12.06 | 188.59,12.06 188.59,18.41 190.5,20.32 190.5,22.86 C3.+ 191.13,23.49 193.67,26.03 226.06,26.03 X6.A31 | X7.C2 74.29,22.22 75.56,23.49 X7.B2 76.2,24.13 77.47,25.4 X7.A2 78.1,26.03 81.91,26.03 88.58,32.7 | X2.C31 X2.B31 X2.A31 115.57,10.79 114.62,11.75 | R1.2 97.79,23.49 88.58,32.7 | 88.58,32.7 87.63,33.65 C2.+ | 114.62,11.75 104.77,21.59 R1.2 | R1.2 | 188.59,12.06 114.93,12.06 114.62,11.75 | X4.A31 278.76,227.33 280.03,228.6 X4.B31 280.67,229.23 281.94,230.5 X4.C31 | X8.A2 X8.B2 X8.C2 | X4.A31 278.76,226.69 278.76,193.04 281.3,190.5 C5.+ | X8.A31 X8.B31 X8.C31 | X6.C2 281.94,74.93 280.67,76.2 X6.B2 280.03,76.83 278.76,78.1 X6.A2 278.13,78.74 276.22,78.74 275.91,79.06 | 275.91,79.06 270.51,84.45 270.51,86.99 C4.+ | 275.91,79.06 226.69,29.84 226.69,26.67 X6.A31 | 225.74,277.81 276.22,227.33 278.13,227.33 X4.A31
  Bottom 1: X3.A2 115.57,292.73 | 115.57,292.73 115.57,286.38 113.66,284.48 113.66,281.94 C7.+ | 190.18,293.05 211.45,271.78 215.9,271.78 C6.+ | 190.18,293.05 189.23,294 X3.A31 | 115.57,292.73 189.86,292.73 190.18,293.05 | 20,115.25 19.05,116.2 12.06,116.2 | 20,115.25 20.32,114.93 22.86,114.93 C1.+ | 12.06,116.2 11.43,116.2 10.79,115.57 X1.A2 | 20,115.25 19.68,114.93 19.68,92.71 17.78,90.8 5V.1 | 11.75,190.18 33.02,211.45 33.02,216.53 C8.+ | 11.75,190.18 10.79,189.23 X1.A31 | 12.06,116.2 12.06,189.86 11.75,190.18 | C5.+ 283.84,190.5 285.75,188.59 292.73,188.59 | 292.73,188.59 293.37,188.59 294,189.23 X8.A2 | 293.05,114.62 270.51,92.07 270.51,87.63 C4.+ | 293.05,114.62 294,115.57 X8.A31 | 292.73,188.59 292.73,114.93 293.05,114.62
GND
  Top 1: X5.C32 76.2,283.84 77.47,282.57 X5.B32 78.1,281.94 79.37,280.67 X5.A32 80.01,280.67 107.31,280.67 113.03,286.38 C7.- 113.03,287.02 113.03,292.73 | X3.C1 X3.B1 X3.A1 113.03,292.73 | X3.C32 X3.B32 X3.A32 191.77,294 | X4.C1 227.96,284.48 226.69,283.21 X4.B1 226.69,282.57 225.42,281.3 X4.A1 225.42,280.67 220.34,275.59 C6.- 219.71,275.59 201.29,294 191.77,294 | 113.03,292.73 190.5,292.73 191.77,294 | X1.C1 X1.B1 X1.A1 10.79,113.03 11.11,113.35 | 12.06,114.3 17.78,114.3 C1.- | 11.11,113.35 12.06,114.3 | X7.C32 20.32,76.2 21.59,77.47 X7.B32 22.22,78.1 23.49,79.37 X7.A32 23.49,80.01 13.97,89.53 GND.1 | GND.1 | GND.1 11.43,102.87 11.43,113.03 11.11,113.35 | X1.C32 X1.B32 X1.A32 10.79,191.77 | X5.C1 20.32,227.96 21.59,226.69 X5.B1 22.22,226.06 23.49,224.79 X5.A1 24.13,224.79 27.62,221.3 | 27.62,221.3 27.94,220.98 29.21,220.98 C8.- | 10.79,191.77 10.79,204.47 27.62,221.3 | 12.06,114.3 12.06,190.5 10.79,191.77 | X4.C32 283.84,228.6 282.57,227.33 X4.B32 281.94,226.69 280.67,225.42 X4.A32 280.67,224.79 280.67,196.21 286.38,190.5 C5.- 292.73,190.5 | X8.C1 X8.B1 X8.A1 294,191.77 292.73,190.5 | X8.C32 X8.B32 X8.A32 294,113.03 | X6.C1 283.84,76.83 282.57,78.1 X6.B1 281.94,78.1 280.67,79.37 X6.A1 280.03,80.01 276.54,83.5 | 276.54,83.5 276.22,83.82 274.32,83.82 C4.- | 294,113.03 294,100.96 276.54,83.5 | 292.73,190.5 292.73,114.3 294,113.03 | X6.C32 227.96,20.95 226.69,22.22 X6.B32 226.06,22.86 224.79,24.13 X6.A32 224.15,24.13 196.85,24.13 191.13,18.41 C3.- 191.13,17.78 191.13,11.43 191.77,10.79 X2.A1 X2.B1 X2.C1 | X7.A1 79.37,23.49 78.1,22.22 X7.B1 77.47,21.59 76.2,20.32 X7.C1 76.2,19.68 92.07,3.81 PWR.K
  Top 1: PWR.K 111.76,3.81 X2.C32 | X2.C32 | X2.C32 X2.B32 X2.A32 | PWR.K
  Bottom 1: X5.A32 79.37,280.03 79.37,270.51 29.84,220.98 C8.- | X7.A1 80.01,24.13 83.18,27.3 83.18,29.84 C2.- 83.18,30.48 34.29,79.37 24.13,79.37 X7.A32 | X2.A1 191.77,10.79 190.5,12.06 114.3,12.06 113.03,10.79 X2.A32 | C4.- 273.68,83.82 273.68,75.56 224.79,26.67 224.79,24.76 X6.A32
N$2
  Bottom 0.254: R1.1 PWR.A | PWR.A | R1.1
SIG0  (via drill 0.25)
  Top 0.254: v16.51,118.74 v87.63,118.74 | v78.74,61.59 80.64,63.5 93.98,63.5 96.52,60.96 135.89,60.96 139.7,57.15 186.69,57.15 187.32,57.78 v193.67,57.78 194.31,58.42 v224.79,58.42 | v224.79,76.83 v271.78,76.83 | v34.92,219.07 64.13,219.07 65.4,217.8 v65.4,216.53 | v225.42,261.62 200.02,261.62 198.12,259.71 v111.76,259.71
  Route2 0.254: v271.78,76.83 272.41,76.83 274.32,74.93 X6.A4
  Route15 0.254: v16.51,118.74 13.97,118.74 12.06,120.65 X1.A4 | v34.92,219.07 29.84,224.15 29.84,229.87 X5.A4 | v65.4,216.53 65.4,218.44 109.22,262.25 | 109.22,262.25 120.65,273.68 X3.A4 | 109.22,262.25 v111.76,259.71 | X8.A4 292.73,184.15 291.46,182.88 227.96,182.88 v224.79,186.05
  Bottom 0.254: 85.09,36.83 85.09,67.94 86.99,69.85 86.99,111.76 87.63,112.39 v87.63,118.74 | 85.09,36.83 85.09,27.3 79.37,21.59 79.37,20.95 76.83,20.95 76.2,21.59 76.2,22.22 76.83,22.86 76.83,24.76 74.29,27.3 74.29,28.57 X7.A4 | X2.A4 185.42,8.89 192.4,8.89 193.67,10.16 v193.67,57.78 | v78.74,61.59 78.74,39.37 81.28,36.83 85.09,36.83 | X2.A4 | v224.79,58.42 v224.79,76.83 v224.79,186.05 224.79,260.98 v225.42,261.62 225.42,266.06 229.23,269.87 229.23,274.32 229.87,274.95 X4.A4
SIG1  (via drill 0.25)
  Top 0.254: v264.79,100.96 v196.21,100.96 | v196.21,120.01 104.77,120.01 | 104.77,120.01 91.44,120.01 | 91.44,120.01 v55.88,120.01 v16.51,120.01 | v19.68,202.56 19.68,201.93 19.05,201.29 19.05,188.59 v55.88,188.59 | v78.74,29.21 75.56,29.21 74.29,27.94 72.39,27.94 X7.B4 | 91.44,120.01 v91.44,119.38 | v102.87,126.36 103.5,126.36 104.77,125.09 104.77,120.01 | v288.92,185.42 288.29,184.78 v196.21,184.78
  Route2 0.254: v196.21,19.05 187.96,10.79 187.96,9.52 187.32,8.89 186.05,8.89 185.42,8.25 184.15,8.25 X2.B4 | v19.68,215.26 19.05,215.9 19.05,218.44 22.22,221.61 22.22,224.79 25.4,227.96 26.03,227.96 26.03,228.6 27.3,229.87 27.3,231.77 X5.B4 | v288.92,185.42 291.46,182.88 295.27,182.88 296.54,184.15 X8.B4
  Route15 0.254: v264.79,100.96 266.06,99.69 266.06,85.09 276.22,74.93 276.22,73.02 X6.B4 | v16.51,120.01 14.6,121.92 9.52,121.92 8.25,120.65 X1.B4 | v78.74,29.21 78.74,51.43 94.61,67.31 94.61,116.2 v91.44,119.38 | X3.B4 120.01,297.18 118.74,295.91 111.76,295.91 v105.41,289.56 | X3.B4 | v200.66,273.68 209.55,282.57 224.79,282.57 227.96,279.4 228.6,279.4 231.14,281.94 233.04,281.94 234.95,280.03 234.95,278.13 234.31,277.49 232.41,277.49 X4.B4
  Bottom 0.254: v196.21,19.05 v196.21,100.96 v196.21,120.01 v196.21,184.78 200.66,189.23 v200.66,273.68 | v19.68,202.56 v19.68,215.26 | v55.88,120.01 v55.88,188.59 | v105.41,289.56 105.41,220.98 104.14,219.71 104.14,140.97 102.87,139.7 v102.87,126.36
SIG2  (via drill 0.25)
  Top 0.254: v81.91,29.21 80.64,27.94 78.1,27.94 76.2,26.03 75.56,26.03 74.93,26.67 73.02,26.67 72.39,26.03 70.48,26.03 X7.C4 | v278.76,90.17 268.6,90.17 261.62,83.18 224.79,83.18 223.52,84.45 v216.53,84.45 194.94,84.45 v193.67,85.72 | v13.33,118.11 13.33,123.19 15.24,125.09 v22.22,125.09 | v20.32,190.5 20.95,189.86 57.78,189.86 59.05,191.13 v102.87,191.13 105.41,188.59 v194.94,188.59 281.94,188.59 282.57,189.23 284.48,189.23 285.11,188.59 286.38,188.59 v286.38,186.69
  Route2 0.254: v23.49,177.8 23.49,179.07 20.32,182.24 v20.32,190.5 20.32,192.4 15.87,196.85 15.87,202.56 v14.6,203.83 | v14.6,215.26 20.95,221.61 20.95,227.33 25.4,231.77 25.4,233.68 X5.C4 | v97.15,284.48 97.79,284.48 111.76,298.45 118.74,298.45 119.38,299.08 120.65,299.08 X3.C4 | v286.38,186.69 286.38,185.42 291.46,180.34 295.27,180.34 295.91,180.97 295.91,182.24 296.54,182.88 297.81,182.88 299.08,184.15 X8.C4
  Route15 0.254: v81.91,29.21 83.82,29.21 88.26,24.76 107.95,24.76 134.62,51.43 168.27,51.43 172.72,55.88 198.12,55.88 v198.75,56.51 | v216.53,84.45 213.36,84.45 200.66,71.75 v198.75,71.75 | v13.33,118.11 12.06,119.38 6.98,119.38 5.71,120.65 X1.C4 | v191.77,284.48 199.39,276.86 199.39,273.68 200.66,272.41 201.29,273.05 202.56,273.05 203.83,274.32 203.83,275.59 209.55,281.3 214.63,276.22 229.23,276.22 231.77,278.76 233.68,278.76 X4.C4
  Bottom 0.254: X2.C4 184.15,6.35 173.35,6.35 172.72,5.71 172.72,4.44 173.35,3.81 173.35,2.54 191.13,2.54 193.04,4.44 193.04,8.25 194.94,10.16 194.94,10.79 198.75,14.6 v198.75,56.51 v198.75,71.75 | v278.76,90.17 278.76,83.82 277.49,82.55 277.49,77.47 278.13,76.83 278.13,76.2 277.49,75.56 277.49,73.66 278.13,73.02 278.13,71.12 X6.C4 | v22.22,125.09 22.86,125.73 22.86,156.84 23.49,157.48 v23.49,177.8 | v14.6,203.83 15.87,205.1 15.87,213.99 v14.6,215.26 | v97.15,284.48 97.15,229.87 102.87,224.15 v102.87,191.13 | v191.77,284.48 194.94,281.3 v194.94,188.59 194.94,186.05 193.67,184.78 v193.67,85.72
SIG3  (via drill 0.25)
  Top 0.254: v16.51,121.28 19.05,123.82 v60.32,123.82 | v62.23,63.5 61.59,62.86 55.24,62.86 53.97,61.59 57.15,58.42 v66.67,58.42 | v127.63,165.73 123.82,161.92 64.77,161.92 64.13,161.29 v59.69,161.29 | v181.61,70.48 v235.58,70.48 | v127.63,207.01 v231.14,207.01
  Route2 0.254: v66.67,58.42 67.31,57.78 67.31,53.97 74.29,46.99 74.29,33.02 72.39,31.11 X7.A5 | v24.13,195.58 25.4,195.58 v59.69,161.29 | v123.19,290.83 X3.A5
  Route15 0.254: X1.A5 14.6,123.19 v16.51,121.28 | v27.94,214.63 31.11,211.45 31.11,205.1 28.57,202.56 28.57,201.29 24.13,196.85 v24.13,195.58 | v181.61,13.33 X2.A5 | v181.61,92.07 173.35,100.33 167.64,100.33 126.36,141.6 126.36,164.46 v127.63,165.73 | v235.58,65.4 241.93,71.75 241.93,72.39 248.92,79.37 267.33,79.37 273.05,73.66 273.05,73.02 X6.A5 | v231.14,181.61 X8.A5
  Bottom 0.254: v62.23,63.5 62.23,101.6 60.32,103.5 v60.32,123.82 59.05,125.09 59.05,160.65 v59.69,161.29 | v27.94,214.63 27.94,209.55 26.67,209.55 25.4,210.82 25.4,220.98 30.48,226.06 30.48,231.77 X5.A5 | v123.19,290.83 127.63,286.38 v127.63,207.01 v127.63,165.73 | v181.61,92.07 v181.61,70.48 v181.61,13.33 | v235.58,70.48 v235.58,65.4 | X4.A5 231.77,273.68 231.14,273.05 v231.14,207.01 v231.14,181.61
SIG4  (via drill 0.25)
  Top 0.254: v86.36,32.38 83.82,32.38 81.28,29.84 80.64,29.84 80.01,30.48 73.66,30.48 73.02,29.84 71.12,29.84 70.48,29.21 X7.B5 | v175.26,58.42 139.7,58.42 v137.79,60.32 | v287.02,77.47 287.02,76.2 280.67,69.85 278.13,69.85 277.49,70.48 274.95,70.48 X6.B5 | v175.26,86.99 v217.17,86.99 v262.89,86.99 | X1.B5 6.35,121.92 6.35,116.84 4.44,116.84 3.81,116.2 3.81,111.12 v6.35,111.12 | v41.27,78.74 41.91,79.37 v45.72,79.37 | X1.B5 | v22.22,202.56 22.86,203.2 v54.61,203.2 | v217.17,220.98 v209.55,220.98 | v217.17,176.53 v290.19,176.53
  Route2 0.254: v287.02,77.47 285.75,77.47 271.14,92.07 263.52,92.07 262.89,92.71 261.62,91.44 261.62,88.26 v262.89,86.99 | v44.45,102.23 45.72,103.5 64.13,103.5 71.75,111.12 73.02,111.12 v74.93,113.03 | X8.B5 297.18,180.97 295.91,179.7 295.91,178.43 295.27,177.8 291.46,177.8 v290.19,176.53 | X8.B5
  Route15 0.254: v86.36,32.38 86.36,40.64 93.34,47.62 93.34,63.5 104.77,74.93 | 104.77,74.93 104.77,117.47 79.37,142.87 | 79.37,142.87 53.97,168.27 53.97,203.2 | 53.97,203.2 53.97,216.53 78.74,241.3 78.74,245.11 94.61,260.98 94.61,280.67 112.39,298.45 121.92,298.45 X3.B5 | X3.B5 | v189.23,22.22 180.34,13.33 180.34,9.52 181.61,8.25 X2.B5 | v190.5,37.46 193.04,40 191.77,41.27 v177.16,41.27 | v137.79,60.32 121.92,60.32 107.31,74.93 104.77,74.93 | v6.35,111.12 15.24,111.12 19.68,106.68 v21.59,106.68 | v21.59,111.12 22.22,110.49 24.76,110.49 36.19,99.06 36.19,97.79 36.83,97.15 36.83,95.88 40,92.71 40,87.63 41.91,85.72 41.91,79.37 v41.27,78.74 | 79.37,142.87 v74.93,138.43 | 53.97,203.2 v54.61,203.2 | v224.79,270.51 224.79,266.7 210.18,252.09 v209.55,252.09
  Bottom 0.254: v189.23,22.22 189.23,24.76 190.5,26.03 v190.5,37.46 | v177.16,41.27 175.26,43.18 v175.26,58.42 v175.26,86.99 | v21.59,111.12 v21.59,106.68 | v45.72,79.37 45.72,100.96 v44.45,102.23 | v74.93,138.43 v74.93,113.03 | v22.22,202.56 23.49,203.83 23.49,220.34 28.57,225.42 28.57,229.23 27.94,229.87 27.94,230.5 28.57,231.14 28.57,233.04 29.21,233.68 X5.B5 | v224.79,270.51 224.79,275.59 227.96,278.76 228.6,278.76 231.77,275.59 233.68,275.59 X4.B5 | v209.55,220.98 v209.55,252.09 | v217.17,86.99 v217.17,176.53 v217.17,220.98
SIG5  (via drill 0.25)
  Top 0.254: v257.81,46.35 254.63,46.35 252.09,48.89 252.09,50.16 270.51,68.58 271.78,68.58 272.41,67.94 273.68,67.94 274.32,68.58 276.86,68.58 X6.C5 | v15.24,103.5 50.8,103.5 53.34,100.96 v65.4,100.96 v93.98,100.96 v172.72,100.96 | v24.76,201.29 24.76,197.48 26.03,197.48 26.67,196.85 v93.98,196.85 115.57,196.85 v116.2,196.21 118.11,194.31 v207.01,194.31 | v209.55,278.76 208.28,277.49 v138.43,277.49 | v137.16,288.29 127.63,278.76 v113.03,278.76 | v220.98,32.38 219.07,30.48 v176.53,30.48
  Route2 0.254: X1.C5 5.08,122.55 6.35,121.28 6.35,112.39 v15.24,103.5 | v65.4,59.69 65.4,52.7 67.94,50.16 67.94,35.56 63.5,31.11 63.5,30.48 66.04,27.94 68.58,27.94 X7.C5 | X1.C5 | v113.03,278.76 110.49,276.22 106.68,276.22 106.04,276.86 106.04,278.76 109.22,281.94 109.85,281.94 119.38,291.46 119.38,295.27 120.01,295.91 121.28,295.91 121.92,296.54 121.92,297.81 123.19,299.08 X3.C5 | v209.55,278.76 224.79,278.76 227.96,281.94 229.23,281.94 233.68,277.49 235.58,277.49 X4.C5
  Route15 0.254: X2.C5 182.24,5.08 183.51,6.35 184.78,6.35 185.42,6.98 185.42,10.79 196.21,21.59 220.98,21.59 | 220.98,21.59 223.52,21.59 225.42,19.68 230.5,19.68 257.17,46.35 v257.81,46.35 | X2.C5 | v21.59,210.82 21.59,205.74 24.76,202.56 v24.76,201.29 | v207.01,194.31 219.07,194.31 229.23,184.15 291.46,184.15 292.73,185.42 295.27,185.42 295.91,184.78 295.91,183.51 296.54,182.88 297.81,182.88 299.08,181.61 X8.C5 | v220.98,22.22 220.98,21.59
  Bottom 0.254: v65.4,59.69 v65.4,100.96 | v21.59,210.82 22.22,211.45 22.22,224.79 23.49,226.06 23.49,226.69 22.86,227.33 22.86,229.23 27.3,233.68 27.3,234.95 X5.C5 | v93.98,100.96 v93.98,196.85 | v113.03,278.76 116.2,275.59 v116.2,196.21 | v138.43,277.49 137.16,278.76 v137.16,288.29 | v220.98,32.38 v220.98,22.22 | v176.53,30.48 175.89,31.11 175.89,35.56 173.99,37.46 173.99,75.56 172.72,76.83 v172.72,100.96
SIG6  (via drill 0.25)
  Top 0.254: v13.33,124.46 15.24,126.36 22.22,126.36 22.86,125.73 v34.29,125.73 | v177.8,28.57 176.53,28.57 v175.89,29.21 174.62,30.48 135.89,30.48 129.54,36.83 74.93,36.83 73.02,34.92 72.39,34.92 70.48,33.02 X7.A6 | v248.92,168.91 269.87,168.91 v270.51,168.27 | v98.42,262.89 99.69,261.62 113.66,261.62 114.3,260.98 198.12,260.98 200.66,263.52 234.95,263.52 v235.58,262.89
  Route2 0.254: X1.A6 12.06,125.73 v13.33,124.46 | X3.A6 125.73,290.19 v98.42,262.89 66.67,231.14 52.07,231.14 51.43,230.5 36.19,230.5 33.02,233.68 X5.A6 | v177.8,15.87 179.07,14.6 X2.A6 | v172.08,68.58 173.35,68.58 184.78,80.01 189.23,80.01 207.01,97.79 207.01,123.19 248.92,165.1 v248.92,168.91
  Route15 0.254: v267.33,78.1 271.14,74.29 271.14,71.12 X6.A6 | v270.51,168.27 276.22,173.99 288.92,173.99 294,179.07 X8.A6
  Bottom 0.254: v34.29,125.73 35.56,127 35.56,148.59 33.02,151.13 33.02,206.37 34.29,207.64 34.29,215.9 34.92,216.53 34.92,217.8 34.29,218.44 30.48,218.44 30.48,217.8 29.21,216.53 26.67,216.53 26.67,220.98 32.38,226.69 32.38,233.68 X5.A6 | v177.8,15.87 v177.8,28.57 | v267.33,78.1 267.33,100.96 269.24,102.87 269.24,122.55 270.51,123.82 v270.51,168.27 | v248.92,168.91 248.92,240.03 235.58,253.36 v235.58,262.89 235.58,263.52 234.31,264.79 234.31,271.78 X4.A6 | v175.89,29.21 172.72,32.38 172.72,67.94 v172.08,68.58
SIG7  (via drill 0.25)
  Top 0.254: v80.64,31.11 79.37,32.38 71.75,32.38 71.12,31.75 69.85,31.75 69.21,31.11 X7.B6 | v87.63,126.36 34.92,126.36 34.29,127 22.86,127 22.22,127.63 v13.97,127.63 | v139.06,60.32 v179.07,60.32 | v85.72,80.64 v139.06,80.64 | v258.44,99.69 257.81,99.06 183.51,99.06 182.88,98.42 v179.07,98.42 | v287.02,150.49 v257.17,150.49 v208.28,150.49 | v43.18,207.64 v84.45,207.64 87.63,210.82 v122.55,210.82
  Route2 0.254: v87.63,126.36 v85.09,128.9 | v13.97,127.63 11.43,127.63 10.79,127 9.52,127 8.25,125.73 X1.B6 | v179.07,19.05 180.34,17.78 180.34,9.52 179.07,8.25 X2.B6 | v258.44,99.69 259.71,98.42 259.71,86.36 262.89,83.18 262.89,81.28 273.05,71.12 273.05,69.21 X6.B6 | X8.B6 297.18,178.43 295.91,177.16 295.91,175.89 295.27,175.26 v291.46,175.26 | X8.B6 | v207.01,260.98 207.01,270.51 208.91,272.41 232.41,272.41 233.04,273.05 234.31,273.05 234.95,273.68 235.58,273.68 X4.B6
  Route15 0.254: v80.64,31.11 80.64,43.81 v80.01,44.45 | v43.18,207.64 29.84,194.31 22.22,194.31 20.95,195.58 20.95,203.83 17.14,207.64 17.14,217.8 20.32,220.98 20.32,226.69 29.21,235.58 30.48,235.58 X5.B6 | v121.92,290.83 124.46,293.37 124.46,295.27 125.73,296.54 X3.B6
  Bottom 0.254: v80.01,44.45 80.01,39.37 81.28,38.1 83.82,38.1 83.82,80.64 | 83.82,80.64 83.82,88.26 85.09,89.53 v85.09,128.9 85.09,207.01 v84.45,207.64 | v179.07,19.05 v179.07,60.32 v179.07,98.42 | v139.06,80.64 v139.06,60.32 | 83.82,80.64 v85.72,80.64 | v291.46,175.26 287.02,170.81 v287.02,150.49 | v257.17,150.49 257.81,149.86 257.81,100.33 v258.44,99.69 | v207.01,260.98 207.01,198.75 209.55,196.21 209.55,172.72 208.28,171.45 v208.28,150.49 | v121.92,290.83 121.92,225.42 122.55,224.79 v122.55,210.82
SIG8  (via drill 0.25)
  Top 0.254: v49.53,104.77 48.89,105.41 15.24,105.41 v13.97,106.68 | v194.94,56.51 187.32,56.51 186.69,55.88 v143.51,55.88 | v73.66,76.2 74.29,75.56 80.64,75.56 81.91,76.83 v143.51,76.83 v173.99,76.83 | v273.05,86.99 273.68,87.63 277.49,87.63 281.94,92.07 281.94,93.98 273.68,93.98 | 273.68,93.98 270.51,93.98 266.7,90.17 v173.99,90.17 | 273.68,93.98 v273.68,97.15 | v213.36,187.32 283.84,187.32 v284.48,187.96 | v104.14,253.36 208.91,253.36 209.55,254 v213.36,254
  Route2 0.254: v13.97,106.68 12.7,107.95 12.06,107.95 8.89,111.12 8.89,121.28 8.25,121.92 6.98,121.92 6.35,122.55 6.35,123.82 5.08,125.09 X1.C6 | X1.C6 | v194.94,24.76 v192.4,22.22 | v14.6,202.56 14.6,196.21 19.05,191.77 19.05,179.7 26.67,172.08 26.67,135.25 33.65,128.27 33.65,116.84 45.72,104.77 v49.53,104.77 | v212.72,260.98 213.36,260.35 238.76,260.35 245.74,267.33 245.74,269.24 240.03,274.95 237.49,274.95 X4.C6
  Route15 0.254: v70.48,38.73 69.85,39.37 69.21,39.37 62.23,46.35 62.23,57.15 | v55.24,64.13 62.23,57.15 | v192.4,22.22 189.23,19.05 189.23,17.14 182.88,10.79 182.88,6.98 182.24,6.35 180.97,6.35 180.34,5.71 179.07,5.71 X2.C6 | v73.66,76.2 73.66,71.12 71.12,68.58 71.12,64.13 64.13,57.15 62.23,57.15 | v273.05,86.99 274.95,85.09 274.95,82.55 276.86,80.64 276.86,78.1 280.03,74.93 280.03,74.29 274.95,69.21 274.95,67.94 X6.C6 | X8.C6 300.99,180.34 300.99,189.86 300.35,190.5 290.19,190.5 287.65,187.96 v284.48,187.96 | X8.C6 | X3.C6 124.46,300.99 108.58,300.99 104.14,296.54 v104.14,295.27 | X3.C6
  Bottom 0.254: v70.48,38.73 71.75,38.73 74.93,35.56 74.93,33.02 72.39,33.02 69.21,29.84 69.21,29.21 67.31,29.21 X7.C6 | v55.24,64.13 54.61,64.77 54.61,99.69 v49.53,104.77 | v194.94,56.51 v194.94,24.76 | v143.51,76.83 v143.51,55.88 | v173.99,76.83 v173.99,90.17 | v284.48,187.96 284.48,107.95 v273.68,97.15 | v14.6,202.56 13.33,203.83 13.33,226.69 23.49,236.85 29.21,236.85 X5.C6 | v212.72,260.98 213.36,260.35 v213.36,254 v213.36,187.32 | v104.14,253.36 v104.14,295.27
SIG9  (via drill 0.25)
  Top 0.254: v267.97,166.37 v250.19,166.37 246.38,170.18 171.45,170.18 163.19,178.43 118.11,178.43 116.84,177.16 v38.1,177.16 | v175.26,31.11 174.62,31.75 135.89,31.75 129.54,38.1 72.39,38.1 69.21,34.92 X7.A7
  Route2 0.254: v34.29,222.25 54.61,222.25 62.23,229.87 66.67,229.87 128.27,291.46 X3.A7 | X2.A7 176.53,14.6 173.99,17.14 173.99,29.84 v175.26,31.11
  Route15 0.254: v267.97,166.37 271.78,166.37 277.49,172.08 289.56,172.08 294,176.53 X8.A7 | v34.29,222.25 34.29,234.31 34.92,234.95 X5.A7 | v44.45,100.96 44.45,91.44 42.54,89.53 41.27,90.8 41.27,94.61 37.46,98.42 37.46,101.6 10.79,128.27 X1.A7 | X7.A7 68.58,34.92 68.58,36.19 67.31,37.46 66.04,37.46 65.4,36.83 64.77,36.83 64.13,37.46 62.86,37.46 62.23,36.83 60.96,36.83 60.32,37.46 60.32,38.73 60.96,39.37 60.96,40.64 60.32,41.27 60.32,42.54 60.96,43.18 60.96,57.15 53.34,64.77 v53.34,73.02 53.34,122.55 38.1,137.79 v38.1,139.7
  Bottom 0.254: v267.97,166.37 267.97,102.87 266.06,100.96 266.06,76.83 267.33,76.83 269.87,79.37 269.87,85.72 274.32,85.72 275.59,84.45 275.59,83.18 274.95,82.55 274.95,76.2 276.22,74.93 276.22,74.29 271.78,69.85 270.51,69.85 269.87,69.21 X6.A7 | v250.19,166.37 250.19,240.03 236.85,253.36 236.85,263.52 236.22,264.16 236.22,269.87 X4.A7 | v44.45,100.96 44.45,78.1 49.53,73.02 v53.34,73.02 | v34.29,222.25 35.56,223.52 35.56,224.15 36.83,225.42 38.1,225.42 v38.1,177.16 v38.1,139.7
SIG10  (via drill 0.25)
  Top 0.254: v208.91,271.14 v114.93,271.14 | v73.66,34.29 74.93,35.56 123.19,35.56 v123.82,34.92 | v184.15,100.96 182.88,99.69 v122.55,99.69 v107.31,99.69 41.91,99.69 v40.64,100.96 39.37,102.23 v16.51,102.23 | v182.88,88.26 v241.3,88.26 | v11.43,207.01 11.43,221.61 22.86,233.04 24.76,233.04 25.4,232.41 26.03,232.41 30.48,236.85 33.02,236.85 X5.B7 | v105.41,219.71 v114.3,219.71
  Route2 0.254: v208.91,271.14 210.82,269.24 220.34,269.24 221.61,267.97 226.69,267.97 227.96,269.24 233.04,269.24 235.58,271.78 236.85,271.78 X4.B7 | v11.43,207.01 11.43,206.37 7.62,202.56 7.62,200.66 15.24,193.04 15.24,189.86 17.14,187.96 17.14,180.34 24.13,173.35 24.13,148.59 24.76,147.95 24.76,135.89 29.21,131.44 29.21,112.39 29.84,111.76 29.84,109.22 38.1,100.96 v40.64,100.96
  Route15 0.254: v111.12,288.29 111.12,278.13 115.57,273.68 115.57,271.78 v114.93,271.14 | v184.15,18.41 177.8,12.06 177.8,9.52 176.53,8.25 X2.B7 | v184.15,100.96 191.77,108.58 198.12,108.58 216.53,127 217.17,127 230.5,140.33 231.14,140.33 254,163.19 259.08,163.19 275.59,179.7 293.37,179.7 294,180.34 295.27,180.34 295.91,179.7 295.91,177.16 296.54,176.53 X8.B7 | v241.3,64.13 254,76.83 263.52,76.83 271.14,69.21 271.14,67.94 X6.B7
  Bottom 0.254: X3.B7 127,298.45 122.55,298.45 121.92,299.08 121.92,300.35 121.28,300.99 111.12,300.99 v111.12,288.29 | X3.B7 | v184.15,100.96 184.15,88.26 | 184.15,88.26 v184.15,18.41 | v73.66,34.29 69.85,34.29 69.21,33.65 69.21,33.02 67.31,33.02 X7.B7 | v123.82,34.92 123.82,70.48 124.46,71.12 124.46,95.88 122.55,97.79 v122.55,99.69 | v241.3,88.26 v241.3,64.13 | 184.15,88.26 v182.88,88.26 | v16.51,102.23 16.51,106.04 12.06,110.49 12.06,114.3 9.52,114.3 8.89,114.93 8.89,127.63 8.25,128.27 X1.B7 | v114.93,271.14 114.3,270.51 v114.3,219.71 | v105.41,219.71 105.41,133.98 107.31,132.08 v107.31,99.69
SIG11  (via drill 0.25)
  Top 0.254: 301.62,152.4 298.45,152.4 298.45,174.62 299.08,175.26 299.08,176.53 X8.C7 | v302.89,151.13 301.62,152.4 | v117.47,248.28 238.12,248.28 240.03,250.19 | v241.3,251.46 240.03,250.19 | v43.18,204.47 v117.47,204.47 | 301.62,152.4 301.62,154.3 304.16,156.84 304.16,194.94 v283.84,194.94 | v250.82,246.38 247.01,250.19 240.03,250.19
  Route2 0.254: v223.52,12.7 199.39,12.7 195.58,8.89 188.59,8.89 187.96,8.25 187.96,6.98 187.32,6.35 178.43,6.35 177.8,5.71 176.53,5.71 X2.C7 | v302.89,151.13 303.53,150.49 303.53,88.9 261.62,46.99 v260.35,46.99 | v72.39,36.83 66.67,31.11 65.4,31.11 X7.C7 | v78.74,66.67 71.12,74.29 64.77,74.29 50.8,88.26 40.64,88.26 v35.56,93.34 | v20.95,100.96 13.33,108.58 13.33,109.85 11.43,111.76 11.43,123.82 10.79,124.46 6.98,124.46 6.35,125.09 6.35,127.63 5.71,128.27 | v17.78,213.36 19.05,213.36 32.38,226.69 32.38,232.41 29.84,234.95 29.84,236.22 31.11,237.49 31.11,238.76 X5.C7 | v13.33,128.9 11.43,128.9 10.79,129.54 6.98,129.54 5.71,128.27 | 5.71,128.27 X1.C7 | v283.84,194.94 279.4,194.94 271.78,202.56 271.78,207.64 269.24,210.18 258.44,210.18 257.81,209.55 243.2,224.15 243.2,238.76 v250.82,246.38
  Route15 0.254: v223.52,12.7 226.06,12.7 v260.35,46.99 | v117.47,290.83 119.38,292.73 119.38,295.27 120.01,295.91 123.82,295.91 124.46,296.54 124.46,297.81 125.09,298.45 126.36,298.45 127,299.08 128.27,299.08 X3.C7 | v72.39,36.83 72.39,50.16 86.36,64.13 86.36,69.21 85.09,70.48 82.55,70.48 v78.74,66.67 | v35.56,93.34 30.48,93.34 22.86,100.96 v20.95,100.96 | v17.78,203.83 17.78,194.31 25.4,186.69 | 25.4,186.69 25.4,184.78 20.95,180.34 v20.32,180.34 | 25.4,186.69 v43.18,204.47
  Bottom 0.254: v260.35,46.99 260.98,47.62 260.98,51.43 267.33,57.78 267.33,59.05 266.7,59.69 266.7,60.96 267.33,61.59 267.33,62.23 266.7,62.86 266.7,64.77 270.51,68.58 271.78,68.58 273.05,67.31 273.05,66.04 X6.C7 | v117.47,290.83 v117.47,248.28 v117.47,204.47 | v241.3,251.46 241.3,263.52 242.57,264.79 240.03,267.33 240.03,269.24 240.66,269.87 240.66,270.51 239.39,271.78 239.39,273.68 X4.C7 | v17.78,203.83 v17.78,213.36 | v20.32,180.34 21.59,179.07 21.59,175.26 22.22,174.62 22.22,157.48 16.51,151.76 16.51,142.87 14.6,140.97 14.6,130.17 v13.33,128.9
SIG12  (via drill 0.25)
  Top 0.254: v81.28,77.47 v73.02,77.47 | X7.A8 67.31,36.83 69.85,36.83 72.39,39.37 v81.28,39.37 v125.73,39.37 | v139.7,41.91 v171.45,41.91 | v222.25,75.56 v259.08,75.56 | v36.83,215.9 37.46,215.26 v70.48,215.26 88.26,215.26 88.9,214.63 177.8,214.63 179.7,216.53 232.41,216.53 233.68,215.26 250.19,215.26 v251.46,213.99 | v55.24,221.61 54.61,222.25 38.73,222.25 v36.83,224.15
  Route2 0.254: X8.A8 291.46,173.99 v251.46,213.99 | v44.45,109.85 45.72,109.85 54.61,118.74 65.4,118.74 71.75,112.39 v73.02,112.39 | X2.A8 175.26,8.89 177.16,8.89 177.8,9.52 177.8,14.6 175.89,16.51 v175.89,19.05 | X2.A8 | X3.A8 130.81,292.73 59.69,221.61 v55.24,221.61
  Route15 0.254: X1.A8 12.7,130.81 33.65,109.85 v44.45,109.85 | v139.7,41.91 128.27,41.91 v125.73,39.37 | v259.08,75.56 259.71,75.56 267.33,67.94 X6.A8 | v222.25,75.56 213.99,67.31 213.99,66.67 196.85,49.53 179.07,49.53 v171.45,41.91 | v36.83,224.15 37.46,224.79 37.46,235.58 36.83,236.22 36.83,236.85 X5.A8
  Bottom 0.254: v251.46,213.99 251.46,240.03 238.12,253.36 238.12,267.33 237.49,267.97 X4.A8 | v73.02,77.47 v73.02,112.39 73.02,135.89 70.48,138.43 v70.48,215.26 | v81.28,39.37 v81.28,77.47 | v175.89,19.05 175.26,19.68 175.26,28.57 171.45,32.38 v171.45,41.91 | v36.83,215.9 v36.83,224.15
SIG13  (via drill 0.25)
  Top 0.254: v261.62,81.91 224.79,81.91 223.52,83.18 v182.88,83.18 173.99,83.18 158.75,98.42 v93.98,98.42 v88.9,98.42 40,98.42 v38.73,99.69 | v31.75,215.26 33.02,213.99 88.26,213.99 v88.9,213.36 | v290.19,185.42 288.29,183.51 v88.9,183.51 | v212.09,234.95 167.64,234.95 165.1,232.41 v107.95,232.41
  Route2 0.254: v261.62,81.91 261.62,77.47 266.7,72.39 266.7,66.67 267.33,66.04 269.24,66.04 X6.B8 | v31.75,215.26 v29.21,217.8 | X3.B8 129.54,298.45 125.09,298.45 124.46,297.81 124.46,296.54 123.82,295.91 122.55,295.91 121.92,295.27 121.92,292.1 107.95,278.13 v107.95,277.49 | X3.B8 | X8.B8 298.45,175.26 298.45,182.24 299.08,182.88 300.35,182.88 300.99,183.51 300.99,184.78 300.35,185.42 292.73,185.42 291.46,184.15 v290.19,185.42 | X8.B8
  Route15 0.254: v182.88,18.41 175.26,10.79 175.26,9.52 173.99,8.25 X2.B8 | v38.73,99.69 38.73,102.87 34.92,106.68 33.65,106.68 10.79,129.54 9.52,129.54 8.25,130.81 X1.B8 | v92.71,19.05 85.72,19.05 74.29,30.48 73.66,30.48 73.02,29.84 71.75,29.84 67.31,34.29 65.4,34.29 X7.B8 | v88.9,213.36 v107.95,232.41 | v212.09,252.09 220.34,252.09 229.23,260.98 229.23,261.62 237.49,269.87 238.76,269.87 X4.B8
  Bottom 0.254: v182.88,83.18 v182.88,18.41 | v29.21,217.8 27.94,219.07 27.94,220.98 33.65,226.69 33.65,227.96 34.29,228.6 34.29,234.31 33.65,234.95 33.65,236.22 34.29,236.85 34.29,238.76 X5.B8 | v88.9,98.42 v88.9,183.51 v88.9,213.36 | v92.71,19.05 92.71,33.65 93.34,34.29 93.34,36.19 92.71,36.83 92.71,76.83 93.98,78.1 v93.98,98.42 | v107.95,232.41 v107.95,277.49 | v212.09,234.95 v212.09,252.09
SIG14  (via drill 0.25)
  Top 0.254: v207.64,97.15 208.28,97.79 v222.25,97.79 273.05,97.79 273.68,98.42 v282.57,98.42 | v56.51,108.58 45.72,108.58 45.08,107.95 13.33,107.95 v12.7,108.58 | v41.91,162.56 v35.56,162.56 | v50.8,133.35 v120.01,133.35 | v210.82,227.96 156.84,227.96 154.94,226.06 v120.01,226.06 | v289.56,169.54 288.92,170.18 247.65,170.18 246.38,171.45 v222.25,171.45 v209.55,171.45
  Route2 0.254: v57.78,57.78 57.78,56.51 66.04,48.26 66.04,37.46 63.5,34.92 63.5,33.02 X7.C8
  Route15 0.254: v190.5,6.35 193.04,6.35 200.02,13.33 200.66,13.33 206.37,19.05 v206.37,19.68 | v35.56,215.9 36.19,216.53 36.19,219.07 33.02,222.25 33.02,231.77 31.75,233.04 31.75,234.31 32.38,234.95 32.38,236.22 31.75,236.85 31.75,238.12 32.38,238.76 32.38,240.66 X5.C8 | v41.91,162.56 41.91,161.29 50.8,152.4 v50.8,133.35 | v120.01,266.06 120.01,266.7 129.54,276.22 129.54,295.27 130.17,295.91 131.44,295.91 132.08,296.54 132.08,297.81 130.81,299.08 X3.C8 | v210.18,253.36 209.55,253.36 208.28,252.09 209.55,250.82 221.61,250.82 240.66,269.87 240.66,271.78 X4.C8 | v289.56,169.54 292.73,172.72 297.81,172.72 299.08,173.99 X8.C8
  Bottom 0.254: X2.C8 175.26,3.81 190.5,3.81 v190.5,6.35 | v206.37,19.68 206.37,85.72 207.64,86.99 v207.64,97.15 | v282.57,98.42 282.57,80.64 283.21,80.01 283.21,77.47 282.57,76.83 282.57,76.2 283.21,75.56 283.21,72.39 274.95,64.13 271.78,64.13 X6.C8 | X2.C8 | v57.78,57.78 57.78,102.23 56.51,103.5 v56.51,108.58 50.8,114.3 v50.8,133.35 | v12.7,108.58 8.89,112.39 8.89,113.66 8.25,114.3 6.35,114.3 6.35,130.17 5.71,130.81 X1.C8 | v35.56,162.56 v35.56,215.9 | v120.01,133.35 v120.01,226.06 v120.01,266.06 | v210.18,253.36 210.82,252.73 v210.82,227.96 210.82,172.72 v209.55,171.45 | v222.25,171.45 v222.25,97.79
SIG15  (via drill 0.25)
  Top 0.254: v175.89,36.83 135.89,36.83 132.08,40.64 v74.93,40.64 72.39,40.64 71.75,40 66.67,40 65.4,38.73 X7.A9 | v215.9,34.29 213.36,31.75 v177.16,31.75 | v239.39,253.36 235.58,249.55 158.75,249.55 157.48,250.82 v124.46,250.82 | v40.64,122.55 v59.05,122.55
  Route2 0.254: v177.16,31.75 175.89,33.02 169.54,26.67 169.54,12.7 171.45,10.79 X2.A9 | X8.A9 292.73,171.45 239.39,224.79 v239.39,253.36 | v40.64,216.53 42.54,218.44 57.78,218.44 v124.46,285.11 133.35,294 X3.A9
  Route15 0.254: X1.A9 12.7,133.35 23.49,122.55 v40.64,122.55 | v40.64,216.53 40.64,227.33 38.73,229.23 38.73,238.76 X5.A9 | v69.21,63.5 67.31,63.5 64.13,66.67 64.13,103.5 66.04,105.41 66.04,115.57 v59.05,122.55
  Bottom 0.254: v175.89,36.83 177.16,35.56 v177.16,31.75 | v215.9,34.29 215.9,6.98 220.34,6.98 245.74,32.38 245.74,37.46 245.11,38.1 245.11,39.37 245.74,40 245.74,40.64 245.11,41.27 245.11,43.18 265.43,63.5 265.43,65.4 X6.A9 | v239.39,253.36 239.39,266.06 X4.A9 | v40.64,216.53 v40.64,122.55 | v124.46,285.11 v124.46,250.82 | v74.93,40.64 69.85,45.72 69.85,62.86 v69.21,63.5
SIG16  (via drill 0.25)
  Top 0.254: v266.06,71.12 259.71,64.77 v252.09,64.77 | v254,163.83 274.32,163.83 274.95,163.19 288.29,163.19 v289.56,164.46 | v154.94,8.89 170.81,8.89 171.45,8.25 X2.B9 | v152.4,17.14 121.92,17.14 121.28,17.78 v114.3,17.78 | v16.51,135.89 90.17,135.89 91.44,137.16 v116.2,137.16 | v34.92,227.96 34.92,222.88 37.46,220.34 65.4,220.34 67.31,218.44 v114.3,218.44 116.84,218.44 118.11,219.71 v130.81,219.71 | v217.17,267.33 200.66,267.33 198.12,264.79 v130.81,264.79 | v112.39,71.75 v122.55,71.75 123.82,73.02 v160.02,73.02 | v252.09,68.58 250.19,68.58 249.55,69.21 173.35,69.21 170.81,71.75 v161.29,71.75
  Route2 0.254: v217.17,267.33 217.8,266.7 237.49,266.7 238.76,267.97 240.66,267.97 X4.B9 | v160.02,73.02 v161.29,71.75
  Route15 0.254: v266.06,71.12 269.24,67.94 269.24,67.31 267.97,66.04 267.97,64.13 X6.B9 | v289.56,164.46 289.56,165.73 294,170.18 295.27,170.18 296.54,171.45 X8.B9 | v154.94,8.89 154.94,14.6 v152.4,17.14 | v114.3,17.78 110.49,13.97 102.23,13.97 99.69,16.51 86.36,16.51 80.64,22.22 79.37,22.22 73.02,28.57 71.75,28.57 71.12,27.94 69.85,27.94 63.5,34.29 63.5,36.19 X7.B9 | v16.51,130.81 16.51,131.44 13.33,134.62 9.52,134.62 8.25,133.35 X1.B9 | v130.81,286.38 130.81,292.73 132.08,294 132.08,295.27 133.35,296.54 X3.B9
  Bottom 0.254: v252.09,64.77 v252.09,68.58 252.09,89.53 253.36,90.8 253.36,113.03 254,113.66 v254,163.83 | v16.51,135.89 v16.51,130.81 | v114.3,218.44 114.3,192.4 115.57,191.13 115.57,139.06 116.2,138.43 v116.2,137.16 116.2,130.17 121.28,125.09 121.28,94.61 122.55,93.34 v122.55,71.75 | v34.92,227.96 37.46,230.5 37.46,236.85 38.1,237.49 36.83,238.76 36.83,240.66 X5.B9 | v130.81,219.71 v130.81,264.79 v130.81,286.38 | v114.3,17.78 113.03,19.05 113.03,20.95 112.39,21.59 v112.39,71.75
SIG17  (via drill 0.25)
  Top 0.254: v95.25,264.16 106.04,264.16 v106.68,263.52 | v64.13,217.8 40,217.8 v39.37,217.17 | v158.75,69.21 v102.87,69.21 v85.09,69.21 | v182.88,91.44 240.03,91.44 | 240.03,91.44 v262.89,91.44 | v240.66,165.1 v287.65,165.1 | 240.03,91.44 v240.03,92.07 | v250.82,266.06 247.01,269.87 243.2,269.87 X4.C9 | v261.62,257.17 261.62,255.9 286.38,231.14 v286.38,230.5 | v103.5,125.09 v39.37,125.09
  Route2 0.254: v106.68,263.52 65.4,222.25 65.4,219.07 v64.13,217.8 | v158.75,16.51 158.75,12.06 160.02,10.79 160.02,4.44 160.65,3.81 164.46,3.81 165.1,4.44 165.1,5.71 165.73,6.35 170.81,6.35 171.45,5.71 X2.C9 | v271.14,65.4 278.13,72.39 278.76,72.39 279.4,71.75 281.3,71.75 283.21,73.66 283.21,75.56 276.86,81.91 271.78,81.91 265.43,88.26 264.79,88.26 262.89,90.17 v262.89,91.44 | v286.38,230.5 286.38,228.6 294,220.98 294,203.2 302.26,194.94 302.26,173.99 X8.C9 | X8.C9
  Route15 0.254: v39.37,121.28 23.49,121.28 12.7,132.08 6.98,132.08 5.71,133.35 X1.C9 | v39.37,217.17 39.37,219.71 35.56,223.52 35.56,234.31 36.19,234.95 36.19,235.58 33.65,238.12 33.65,240.03 34.29,240.66 34.29,242.57 X5.C9 | v69.21,40.64 69.21,48.26 85.09,64.13 v85.09,69.21 | v182.88,91.44 160.65,69.21 v158.75,69.21 | v287.65,165.1 289.56,163.19 294,167.64 295.27,167.64 295.91,168.27 295.91,169.54 296.54,170.18 297.81,170.18 299.08,171.45 X8.C9 | v250.82,266.06 259.71,257.17 v261.62,257.17
  Bottom 0.254: v39.37,217.17 v39.37,125.09 v39.37,121.28 | X3.C9 128.9,304.16 95.25,304.16 v95.25,264.16 | X3.C9 | v69.21,40.64 69.21,41.27 62.86,41.27 60.32,38.73 60.32,37.46 60.96,36.83 60.96,34.92 X7.C9 | v158.75,16.51 v158.75,69.21 | v271.14,65.4 269.87,64.13 269.87,62.23 X6.C9 | v240.66,165.1 240.66,92.71 v240.03,92.07 | v103.5,125.09 103.5,69.85 v102.87,69.21
SIG18  (via drill 0.25)
  Top 0.254: v88.26,97.15 v37.46,97.15 | v20.95,212.72 22.22,211.45 31.75,211.45 32.38,210.82 v36.83,210.82 | v219.71,27.3 224.15,27.3 225.42,28.57 225.42,31.11 v226.06,31.11 | v259.08,71.75 v234.95,71.75 | v228.6,84.45 v234.95,84.45 | v36.83,178.43 116.84,178.43 118.11,179.7 129.54,179.7 132.08,182.24 223.52,182.24 224.15,181.61 v228.6,181.61
  Route2 0.254: v17.14,219.07 15.87,220.34 15.87,226.06 30.48,240.66 31.11,240.66 38.73,233.04 39.37,233.04 40.64,234.31 40.64,240.66 X5.A10 | v234.95,71.75 v231.14,67.94 | v234.31,261.62 235.58,261.62 238.12,264.16 240.66,264.16 X4.A10 | 237.49,236.85 237.49,224.15 292.73,168.91 X8.A10 | 237.49,236.85 v237.49,245.74 | 237.49,236.85 228.6,236.85 | 228.6,236.85 219.07,236.85 199.39,256.54 171.45,256.54 154.3,273.68 154.3,275.59 135.89,294 X3.A10 | 228.6,236.85 v228.6,227.96
  Route15 0.254: X1.A10 15.24,135.89 17.78,133.35 28.57,133.35 v36.83,125.09 | v219.71,27.3 219.07,26.67 192.4,26.67 187.32,21.59 179.7,21.59 168.91,10.79 X2.A10 | v259.08,71.75 262.25,68.58 262.25,65.4 263.52,64.13 X6.A10
  Bottom 0.254: v37.46,97.15 37.46,100.33 36.83,100.96 v36.83,125.09 v36.83,178.43 v36.83,210.82 | v88.26,97.15 88.26,34.92 88.9,34.29 88.9,30.48 86.36,27.94 86.36,17.78 83.18,14.6 75.56,14.6 75.56,18.41 65.4,28.57 65.4,29.84 66.04,30.48 66.04,31.75 65.4,32.38 65.4,33.02 66.04,33.65 66.04,35.56 63.5,38.1 63.5,39.37 X7.A10 | v17.14,219.07 20.95,215.26 v20.95,212.72 | v226.06,31.11 229.87,34.92 229.87,47.62 231.14,48.89 v231.14,67.94 | v234.31,261.62 234.31,252.09 237.49,248.92 v237.49,245.74 | v234.95,84.45 v234.95,71.75 | v228.6,227.96 v228.6,181.61 v228.6,84.45
SIG19  (via drill 0.25)
  Top 0.254: v123.19,262.25 198.12,262.25 200.66,264.79 236.85,264.79 v245.11,256.54 | v13.33,138.43 v73.66,138.43 | v102.87,85.09 169.54,85.09 v170.18,84.45 173.99,80.64 215.9,80.64 217.17,79.37 262.25,79.37 v264.16,81.28 v268.6,81.28
  Route2 0.254: 286.38,173.99 292.73,167.64 295.27,167.64 296.54,168.91 X8.B10 | 286.38,173.99 v254,206.37 | X3.B10 135.25,297.18 133.98,295.91 125.09,295.91 124.46,295.27 124.46,290.19 v123.19,288.92 | X3.B10 | 286.38,173.99 273.05,160.65 v273.05,158.11
  Route15 0.254: v13.33,138.43 12.06,137.16 9.52,137.16 8.25,135.89 X1.B10 | v15.87,184.15 13.33,186.69 13.33,225.42 31.75,243.84 35.56,243.84 36.19,243.2 38.1,243.2 X5.B10 | 101.6,85.09 101.6,110.49 v73.66,138.43 | 101.6,85.09 101.6,73.02 83.18,54.61 83.18,32.38 78.74,27.94 67.31,39.37 64.77,39.37 64.13,38.73 61.59,38.73 X7.B10 | v170.18,13.33 167.64,10.79 167.64,9.52 168.91,8.25 X2.B10 | 101.6,85.09 v102.87,85.09 | v263.52,69.85 263.52,66.04 265.43,64.13 265.43,62.23 X6.B10
  Bottom 0.254: v254,206.37 254,240.03 245.11,248.92 v245.11,256.54 245.11,259.71 245.74,260.35 245.74,261.62 245.11,262.25 245.11,263.52 245.74,264.16 245.74,265.43 245.11,266.06 243.2,266.06 X4.B10 | v123.19,262.25 v123.19,288.92 | v13.33,138.43 13.33,181.61 v15.87,184.15 | v170.18,13.33 171.45,14.6 173.99,14.6 173.99,28.57 170.18,32.38 v170.18,84.45 | v263.52,69.85 264.16,70.48 v264.16,81.28 | v273.05,158.11 273.05,136.52 273.68,135.89 273.68,109.22 275.59,107.31 275.59,102.87 269.24,96.52 269.24,88.26 268.6,87.63 v268.6,81.28
SIG20  (via drill 0.25)
  Top 0.254: v185.42,58.42 188.59,61.59 255.27,61.59 v255.9,62.23 | v80.01,61.59 93.34,61.59 93.98,60.96 95.25,60.96 96.52,59.69 135.89,59.69 140.97,54.61 v185.42,54.61 | v26.67,84.45 36.83,84.45 38.1,83.18 48.26,83.18 49.53,81.91 60.32,81.91 61.59,80.64 v66.67,80.64 | v39.37,234.31 38.73,233.68 38.73,224.79 v41.91,224.79 | v41.91,201.93 77.47,201.93 79.37,200.02 80.64,200.02 81.91,198.75 v86.36,198.75 | v219.71,270.51 217.8,270.51 217.17,269.87 v115.57,269.87
  Route2 0.254: v80.01,61.59 69.85,71.75 68.58,71.75 67.31,70.48 v66.67,70.48 61.59,70.48 60.96,71.12 52.7,62.86 45.72,62.86 44.45,61.59 56.51,49.53 56.51,48.26 59.05,45.72 59.05,45.08 58.42,44.45 58.42,43.18 59.05,42.54 59.05,41.91 59.69,41.27 60.32,41.27 60.96,40.64 60.96,39.37 59.69,38.1 59.69,36.83 X7.C10 | v25.4,97.15 25.4,98.42 15.24,108.58 15.24,128.9 12.06,132.08 9.52,132.08 8.89,132.71 8.89,133.98 8.25,134.62 6.98,134.62 5.71,135.89 X1.C10 | v39.37,234.31 39.37,240.03 36.83,242.57 36.83,244.47 X5.C10 | v115.57,266.06 v115.57,269.87
  Route15 0.254: v185.42,19.68 182.88,19.68 175.89,12.7 172.08,12.7 170.18,10.79 170.18,6.98 168.91,5.71 X2.C10 | v255.9,62.23 258.44,59.69 259.08,59.69 263.52,55.24 264.79,55.24 267.33,57.78 267.33,59.69 X6.C10 | v86.36,112.39 86.36,100.33 v66.67,80.64 | X3.C10 135.25,299.72 133.35,301.62 130.81,301.62 129.54,300.35 129.54,296.54 128.9,295.91 127.63,295.91 127,295.27 127,285.11 125.73,283.84 125.73,276.22 v115.57,266.06 114.3,264.79 114.3,262.25 114.93,261.62 67.94,214.63 67.94,210.82 69.21,209.55 75.56,209.55 v86.36,198.75 | X3.C10 | X8.C10 301.62,170.81 301.62,173.99 300.35,175.26 294,175.26 283.84,165.1 267.33,165.1 258.44,156.21 257.17,156.21 250.19,149.22 250.19,148.59 239.39,137.79 238.12,137.79 232.41,132.08 232.41,131.44 212.09,111.12 208.28,111.12 207.01,109.85 200.66,109.85 195.58,104.77 194.94,104.77 187.96,97.79 186.69,97.79 184.78,95.88 184.78,95.25 184.15,94.61 184.15,83.82 189.86,78.1 189.86,76.83 197.48,69.21 210.18,69.21 212.72,66.67 207.01,60.96 194.94,60.96 191.13,57.15 186.69,57.15 v185.42,58.42 | X8.C10 | v219.71,270.51 220.98,271.78 226.69,271.78 227.96,270.51 234.31,270.51 238.76,274.95 240.03,274.95 245.11,269.87 245.11,268.6 X4.C10
  Bottom 0.254: v185.42,58.42 v185.42,54.61 v185.42,19.68 | v25.4,97.15 26.67,95.88 v26.67,84.45 | v66.67,70.48 v66.67,80.64 | v41.91,201.93 v41.91,224.79 | v86.36,112.39 v86.36,198.75
SIG21  (via drill 0.25)
  Top 0.254: v243.84,73.02 v189.23,73.02 161.29,73.02 160.02,71.75 v126.36,71.75 | v148.59,247.01 241.93,247.01 v243.84,248.92 | v95.25,52.07 v64.77,52.07